# Altium PCB Tigershark 3D R2.3 - TR.PcbDoc (part 1 of 4)
Units mil, origin at the board's own origin, x right, y up, seen from the top; angles counter-clockwise.
Board outline 4100 x 4050 mil, 4 copper layers (Top Layer, Groun Plane, Power Plane, Bottom Layer), stack 61.73 mil thick; 367 components, 240 nets, 1160 pads, 805 vias.
Unrouted connection lines stored in the file: 6.
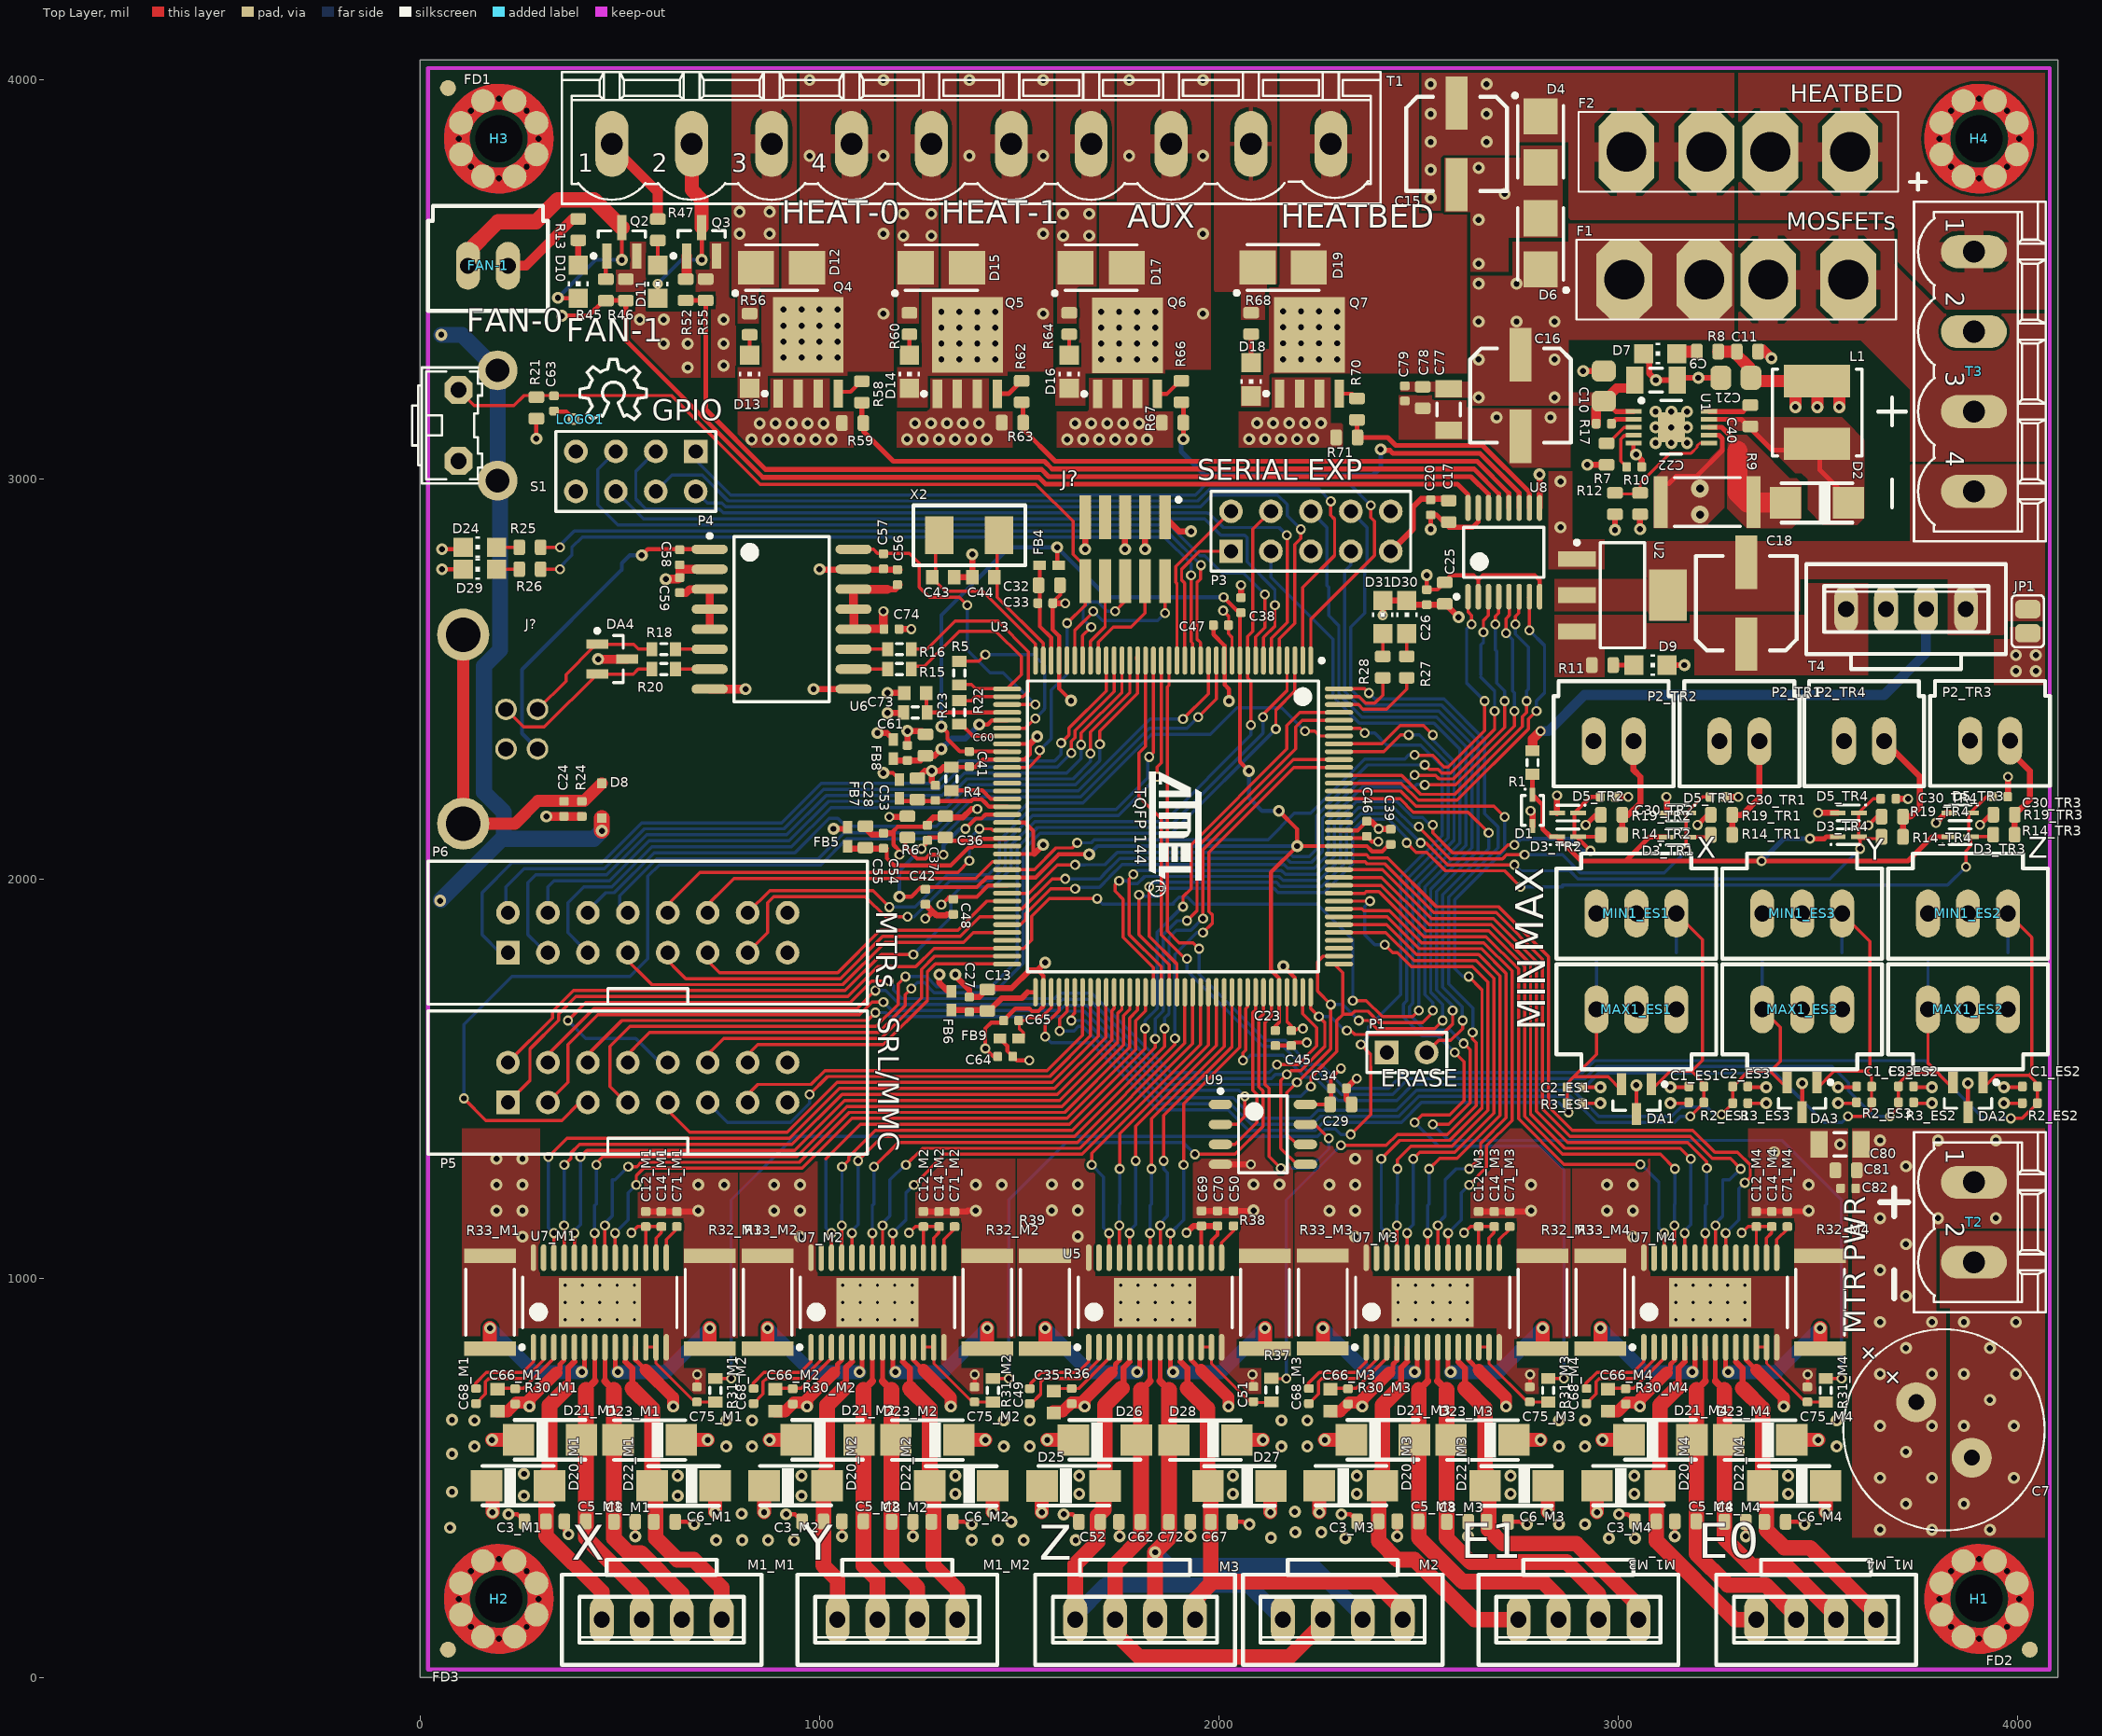
[diagram p0: Top Layer view]
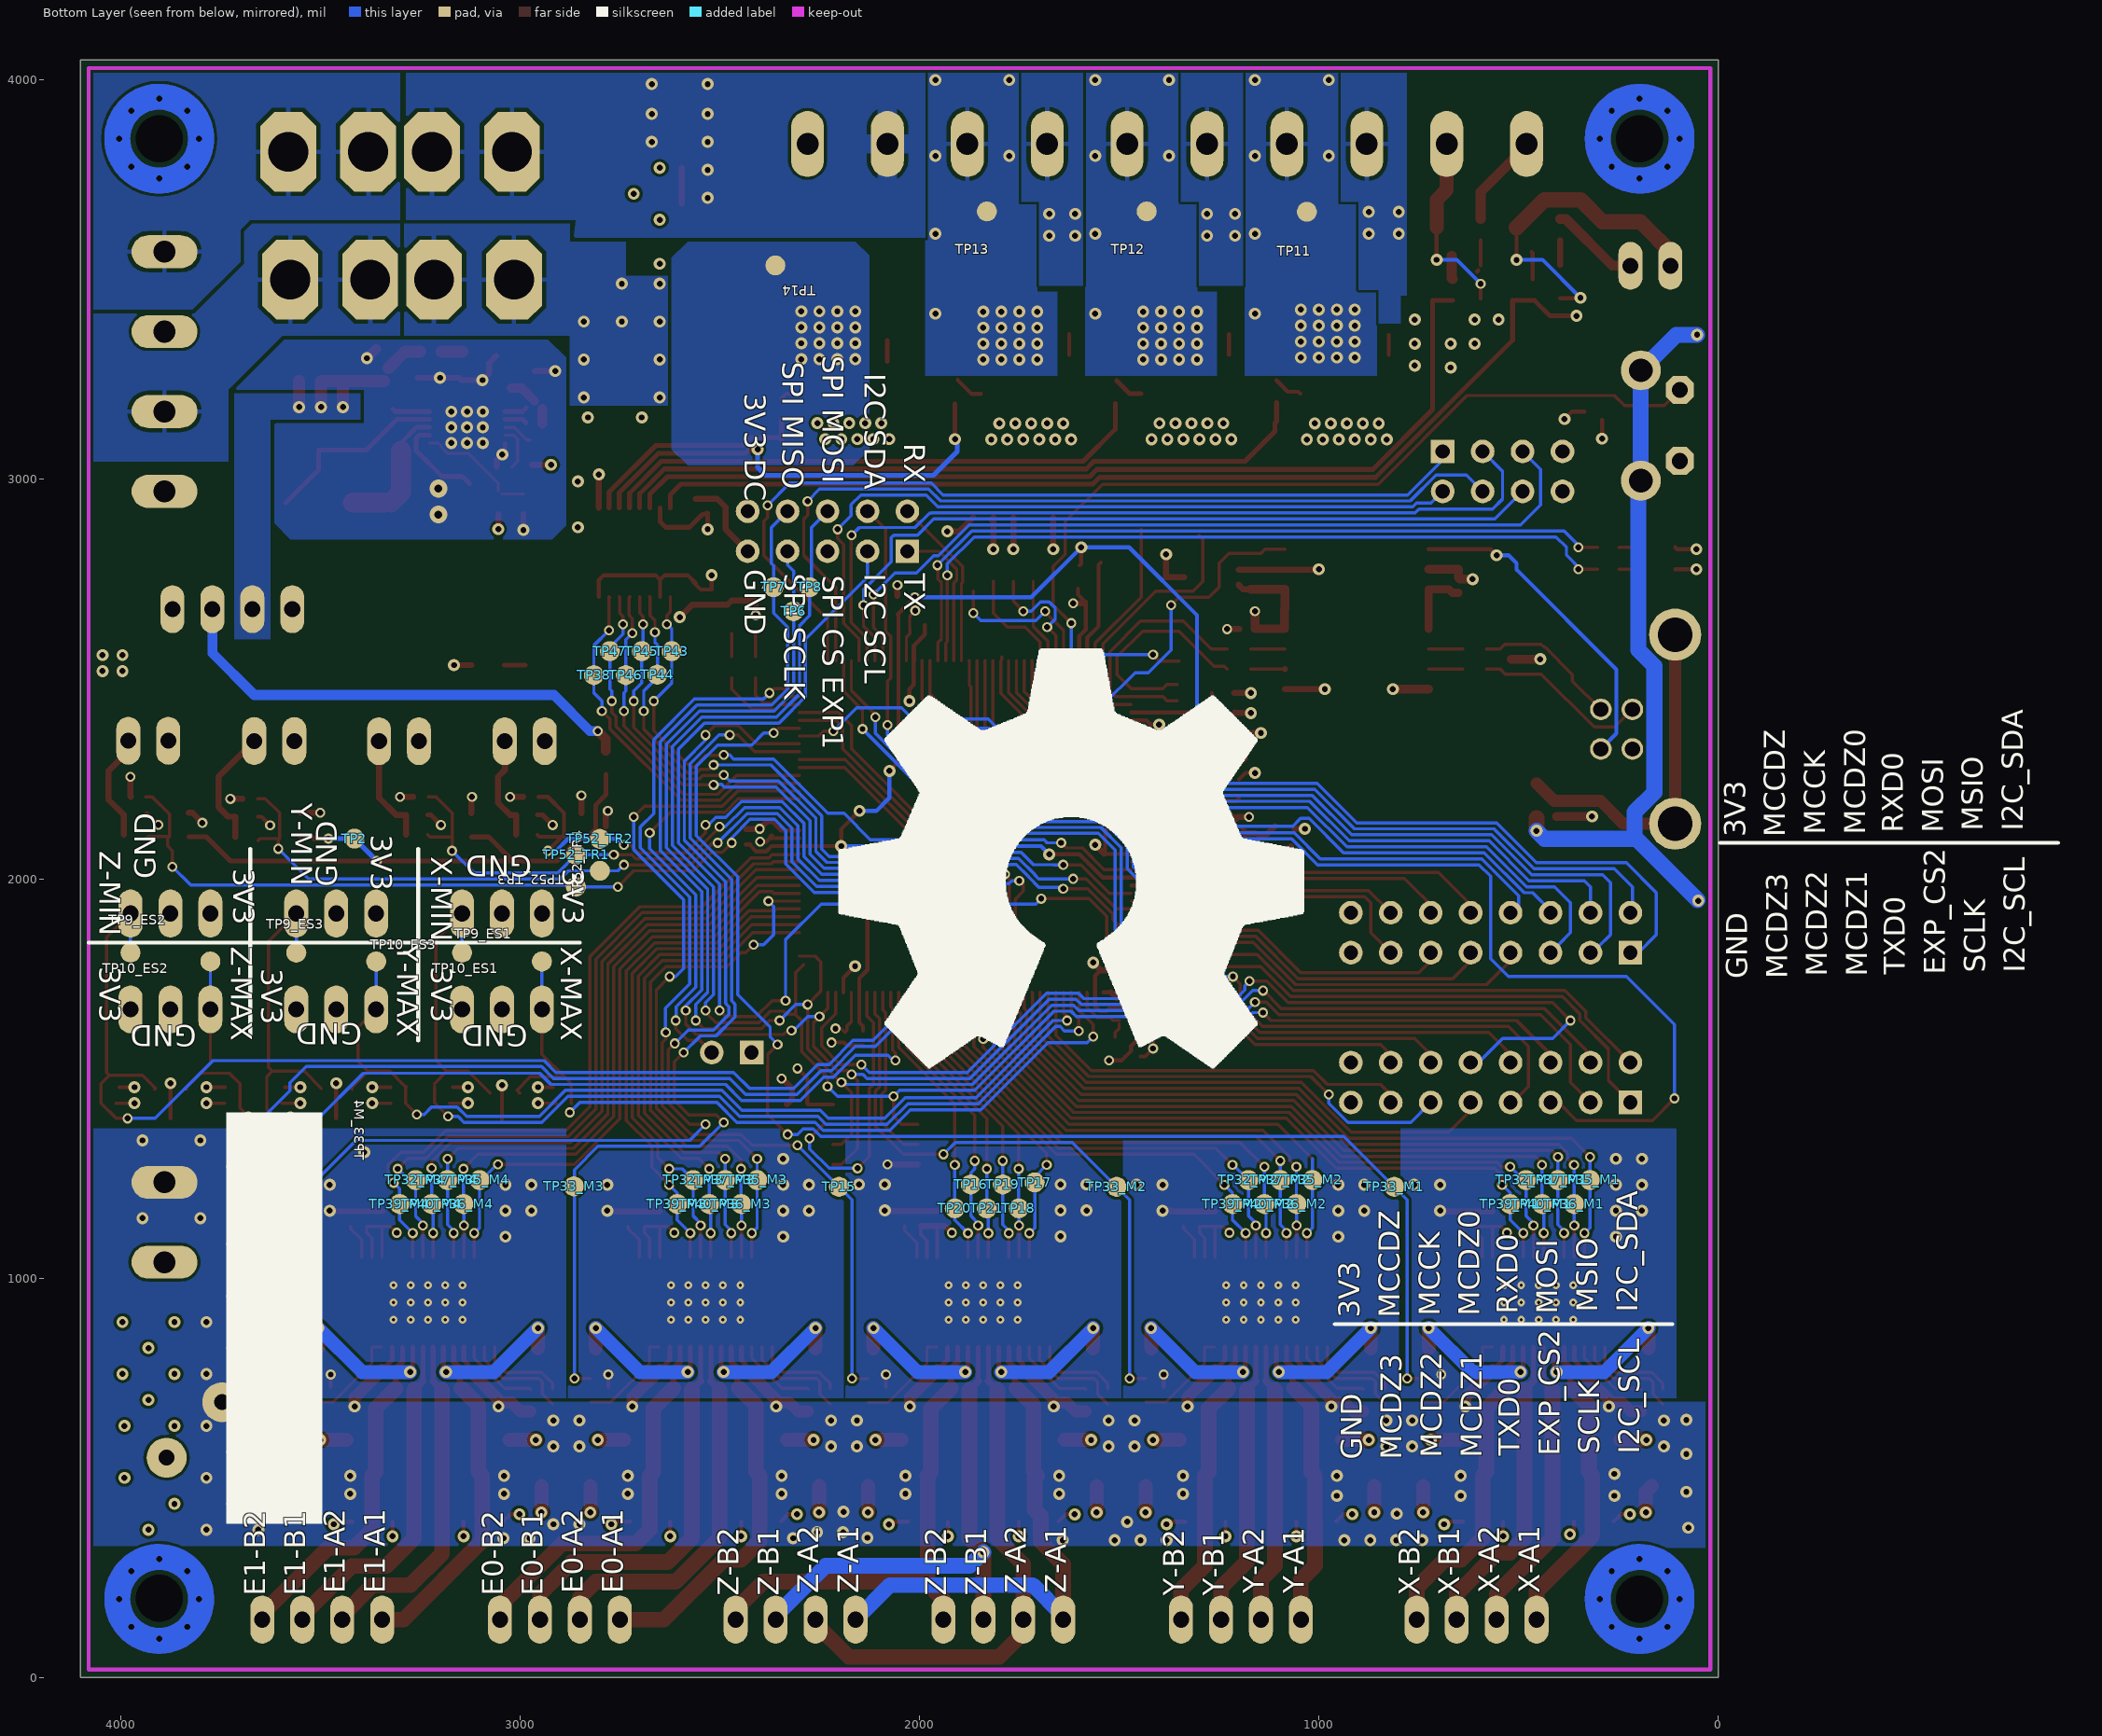
[diagram p1: Bottom Layer view, seen from below]
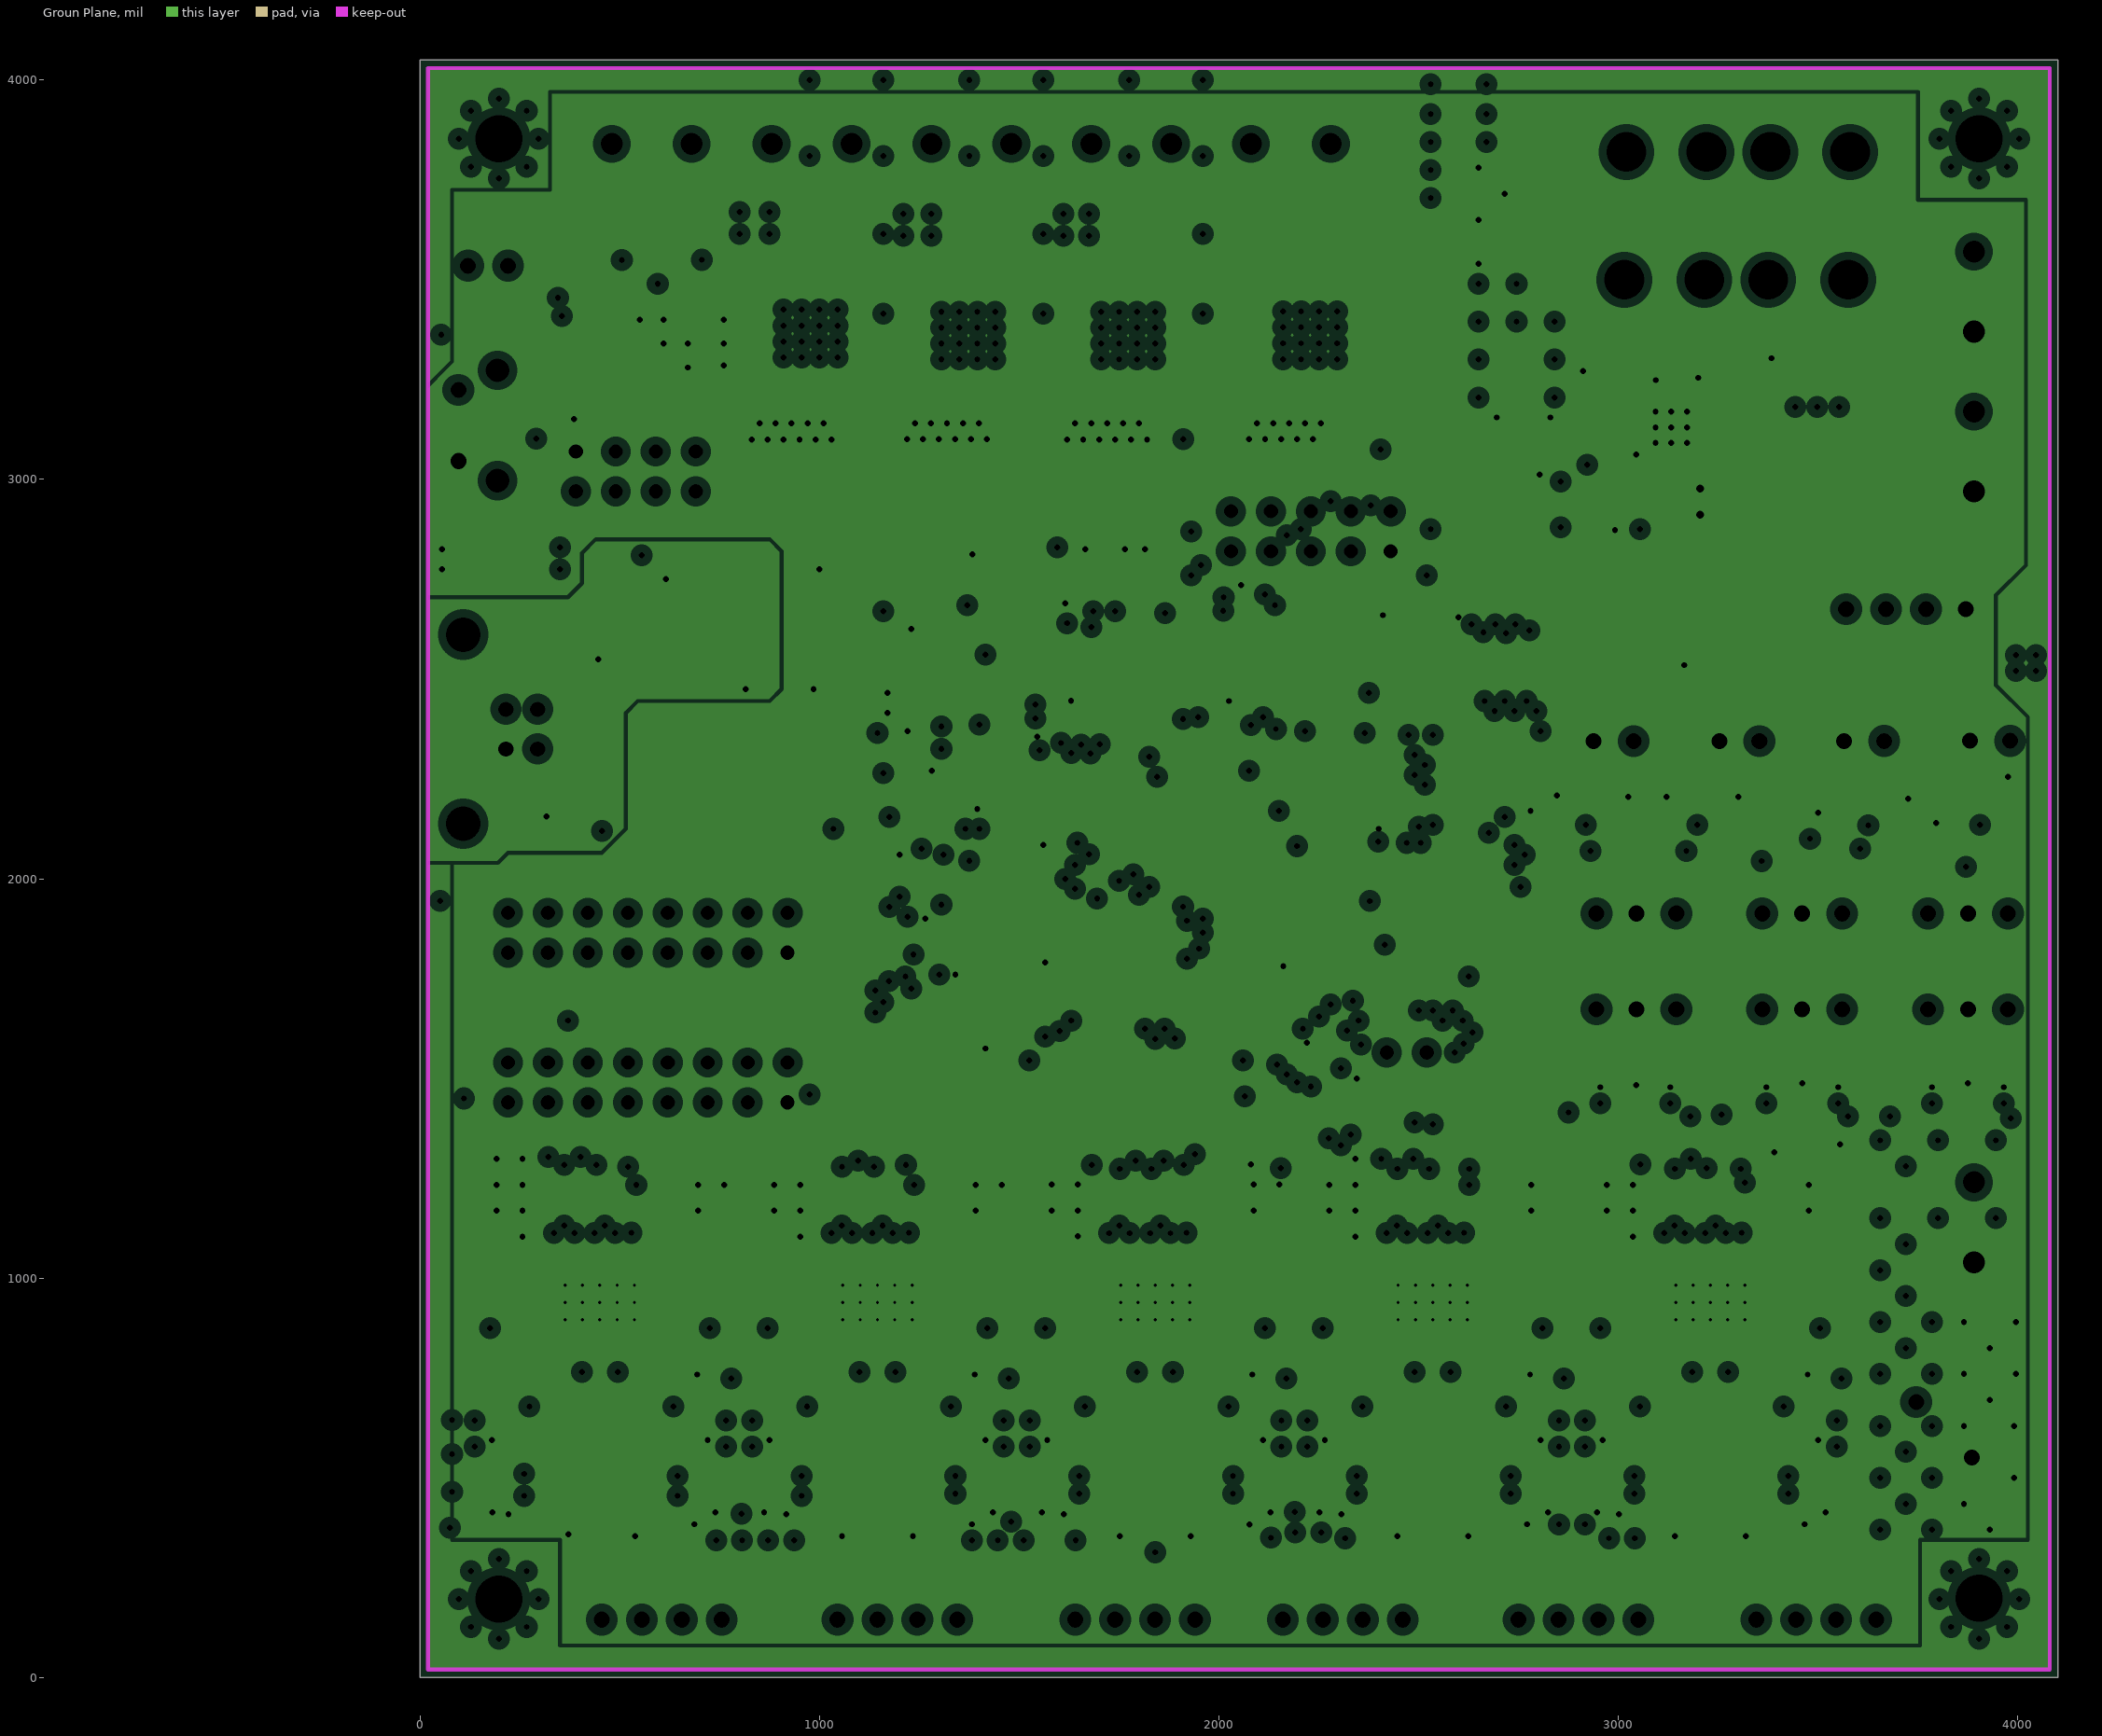
[diagram p2: Groun Plane, clearances drawn from the general rule]
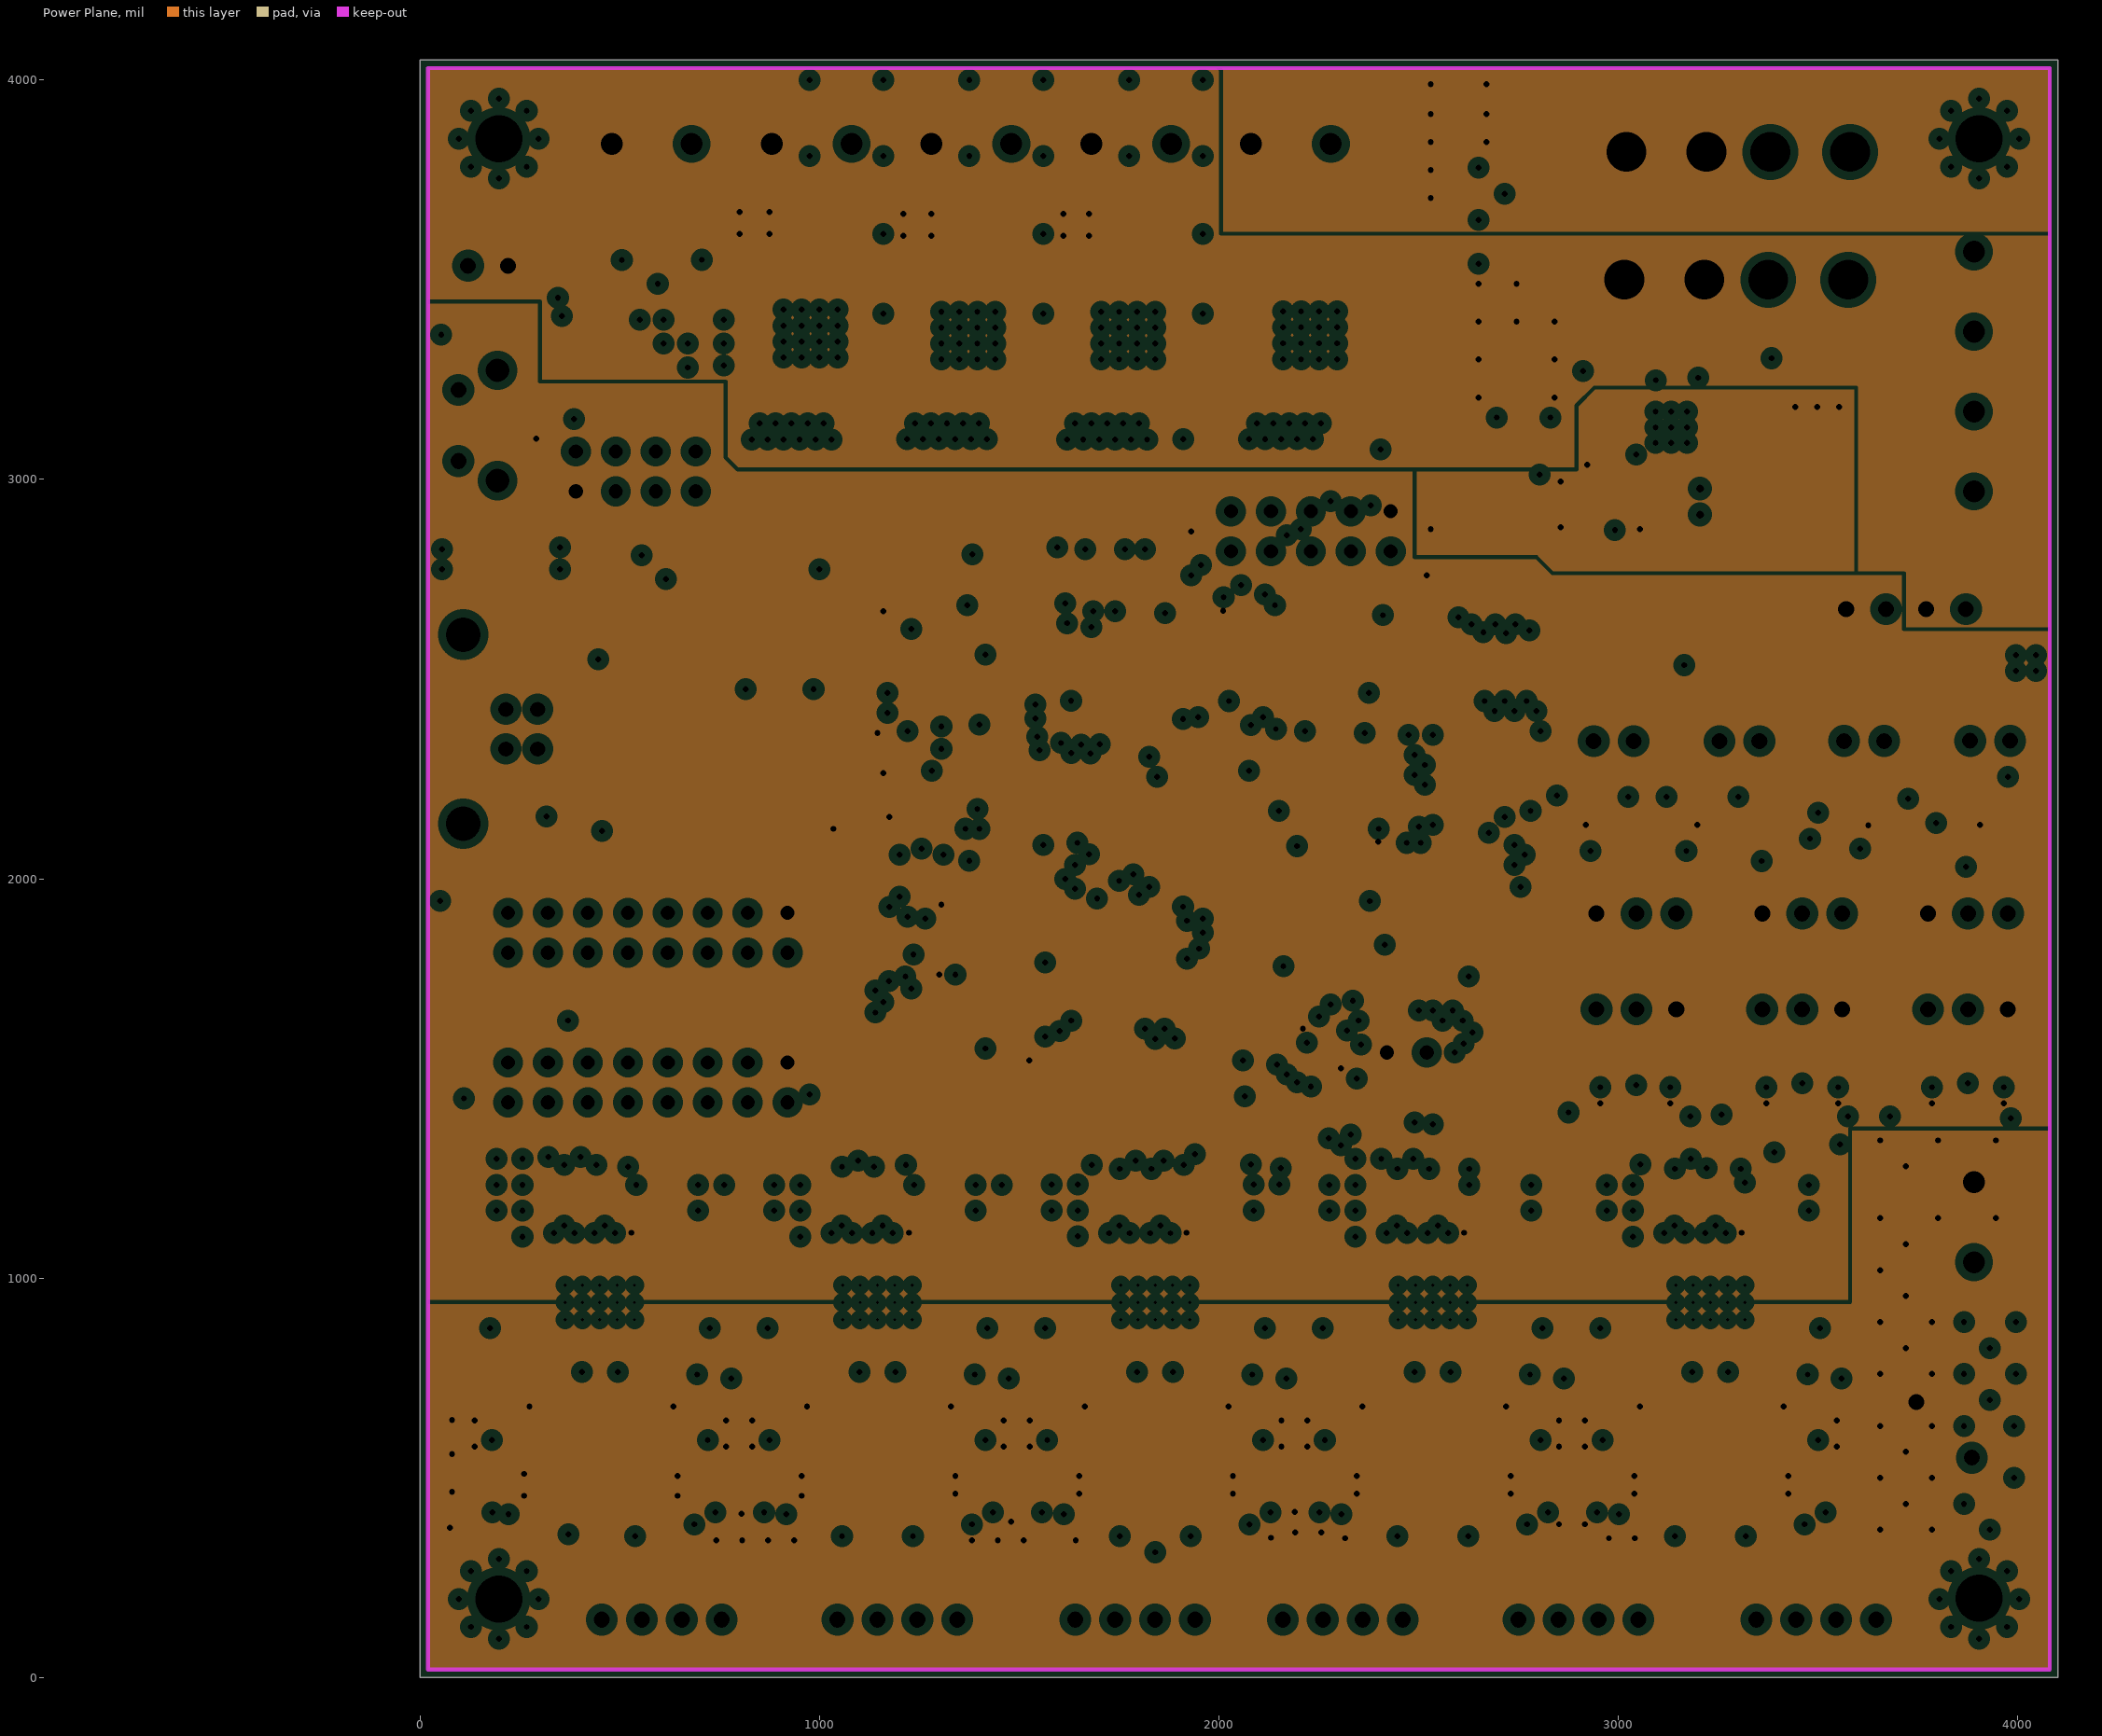
[diagram p3: Power Plane, clearances drawn from the general rule]

## Layer stack, top to bottom
Top Solder: solder mask 0.4, Solder Resist, Dk 3.5
Top Layer: signal copper 2.75
Dielectric1: prepreg 21.654, FR-4, Dk 4.2
Groun Plane: plane copper 1.4, net (Multiple Nets)
Dielectric2: core 10.236, FR-4, Dk 4.2
Power Plane: plane copper 1.4, net (Multiple Nets)
Dielectric3: prepreg 21.54, FR-4, Dk 4.2
Bottom Layer: signal copper 2.75
Bottom Solder: solder mask 0.4, Solder Resist, Dk 3.5

## Board outline
0,0 4100,0 4100,4050 0,4050

## Design rules (kind name [scope] priority, off if disabled: settings)
Clearance [All] p1: gap=7
ComponentClearance [All] p1: gap=0 collisioncheckmode=3 verticalgap=10 showdistances=FALSE
DiffPairsRouting [All] p1: maxlimit=10 minlimit=10 mostfreqgap=10 toplayer_minwidth=15 toplayer_maxwidth=15 toplayer_prefwidth=15 bottomlayer_minwidth=15 bottomlayer_maxwidth=15 bottomlayer_prefwidth=15 maxuncoupledlength=500
FanoutControl Fanout_SOIC [(InComponent('U8') AND InComponent('U7'))] p3: bgadir=Out bgaviamode=Centered fanoutstyle=Staggered fanoutdirection=Alternating viagrid=1 // Fanout_SOIC (Default Rule)
FanoutControl Fanout_Small [All] p4: bgadir=Out bgaviamode=Centered fanoutstyle=Auto fanoutdirection=Alternating viagrid=1 // Fanout_Small (Default Rule)
HoleSize [All] p1: absolutevalues=TRUE maxlimit=200 minlimit=15 maxpercent=80.000 minpercent=20.000
MinimumSolderMaskSliver [All] p1 off: minsoldermaskwidth=10
PlaneClearance [All] p1: clearance=20
PlaneConnect "Thermal Relief 50mil" [(InComponent('F1') or InComponent('F2') or InComponent('T1') or InComponent('T2') or InComponent('T3') or InComponent('C7'))] p1: planeconnectstyle=Relief reliefexpansion=20 reliefentries=4 reliefconductorwidth=10 reliefairgap=10
PlaneConnect "Thermal Relief 24mil" [(InComponent('P2_TR1') OR InComponent('P2_TR2') OR InComponent('MIN1_ES1') OR InNet('MAX_ES1') OR InComponent('MAX1_ES2') OR InComponent('MIN1_ES2') OR InComponent('MIN1_ES3') OR InComponent('MAX1_ES3') OR InComponent('S1') OR InComponent('USB') OR InComponent('P3') OR InComponent('P4') OR InComponent('P5') OR InComponent('P6')  OR InComponent('FAN-1'))] p2: planeconnectstyle=Relief reliefexpansion=20 reliefentries=4 reliefconductorwidth=10 reliefairgap=10
PlaneConnect [All] p3: planeconnectstyle=Direct reliefexpansion=35 reliefentries=4 reliefconductorwidth=50 reliefairgap=10
PolygonConnect "50mil Thermal Relief Top Layer Rule" [InComponent('T1') vs ((InNet('+12VCC2') And OnLayer('Top Layer')) or (InNet('HTRA') And OnLayer('Top Layer')) or (InNet('HTR0') And OnLayer('Top Layer')) or (InNet('HTR1') And OnLayer('Top Layer'))  or (InNet('HTBD') And OnLayer('Top Layer'))or (InNet('NetF2_1') And OnLayer('Top Layer'))or (InNet('NetF1_1') And OnLayer('Top Layer'))or (InNet('GND') And OnLayer('Top Layer')))] p1: connectstyle=Relief reliefconductorwidth=50 reliefentries=4 polygonreliefangle="90 Angle" airgapwidth=10
PolygonConnect "50mil Thermal Relief Top Layer Rule 2" [InComponent('F2')   or InComponent('F1') or InComponent('T3') vs ((InNet('+12VCC3') And OnLayer('Top Layer')) or (InNet('NetF2_1') And OnLayer('Top Layer')) or (InNet('NetF1_1' And OnLayer('Top Layer'))))] p2: connectstyle=Relief reliefconductorwidth=50 reliefentries=4 polygonreliefangle="90 Angle" airgapwidth=10
PolygonConnect "50mil Thermal Relief Top Layer Rule 3" [InComponent('F1') or InComponent('T1') vs ((InNet('NetF1_1') And OnLayer('Top Layer')) or (InNet('+12VCC3') And OnLayer('Bottom Layer')))] p3: connectstyle=Relief reliefconductorwidth=50 reliefentries=4 polygonreliefangle="90 Angle" airgapwidth=10
PolygonConnect "12mil Thermal Relief Top Layer Rule_1" [InComponent('T1') vs InNet('+12VCC3') And OnLayer('Top Layer')] p4: connectstyle=Relief reliefconductorwidth=12 reliefentries=4 polygonreliefangle="90 Angle" airgapwidth=10
PolygonConnect "12mil Thermal Relief Bottom Layer Rule" [InComponent('T1') or InComponent('F1') or InComponent('F2') or InComponent('T3') vs ((InNet('+12VCC2') And OnLayer('Bottom Layer')) or (InNet('+12VCC3') And OnLayer('Bottom Layer')) or (InNet('NetF1_1') And OnLayer('Bottom Layer')) or (InNet('NetF2_1') And OnLayer('Bottom Layer')))] p5: connectstyle=Relief reliefconductorwidth=12 reliefentries=4 polygonreliefangle="90 Angle" airgapwidth=10
PolygonConnect "T3 12mil Thermal Relief Bottom Layer Rule_1" [InComponent('T3') vs ((InNet('GND') And OnLayer('Bottom Layer')) or (InNet('NetF2_1') And OnLayer('Bottom Layer')) or (InNet('NetF1_1') And OnLayer('Bottom Layer')))] p6: connectstyle=Relief reliefconductorwidth=12 reliefentries=4 polygonreliefangle="90 Angle" airgapwidth=10
PolygonConnect "T3 12mil Thermal Relief Bottom Layer Rule" [InComponent('T1') vs ((InNet('GND') And OnLayer('Bottom Layer'))  or (InNet('HTRA') And OnLayer('Bottom Layer')) or (InNet('HTR0') And OnLayer('Bottom Layer')) or (InNet('HTR1') And OnLayer('Bottom Layer'))  or (InNet('HTBD') And OnLayer('Bottom Layer')))] p7: connectstyle=Relief reliefconductorwidth=12 reliefentries=4 polygonreliefangle="90 Angle" airgapwidth=10
PolygonConnect "24mil Thermal Relief" [(InComponent('P2_TR1') OR InComponent('P2_TR2') OR InComponent('MIN1_ES1') OR InNet('MAX_ES1') OR InComponent('MAX1_ES2') OR InComponent('MIN1_ES2') OR InComponent('MIN1_ES3') OR InComponent('MAX1_ES3') OR InComponent('S1') OR InComponent('USB') OR InComponent('P3') OR InComponent('P4') OR InComponent('P5') OR InComponent('P6')OR InComponent('FAN-1'))] p8: connectstyle=Relief reliefconductorwidth=24 reliefentries=4 polygonreliefangle="90 Angle" airgapwidth=10
PolygonConnect [All] p9: connectstyle=Direct reliefconductorwidth=45 reliefentries=4 polygonreliefangle="90 Angle" airgapwidth=10
RoutingVias [All] p1: holewidth=15 width=25 viastyle="Through Hole" minholewidth=15 minwidth=25 maxholewidth=28 maxwidth=50
SilkToSilkClearance [All] p1 off: silktosilkclearance=10
SilkToSolderMaskClearance SilkscreenOverComponentPads [IsPad] p1 off: minsilkscreentomaskgap=10 clearancetoexposedcopper=TRUE
SolderMaskExpansion [All] p1: expansion=4
UnpouredPolygon [All] p1: allowunpoured=FALSE
Width [All] p1: maxlimit=200 minlimit=7 preferedwidth=8 minimp=50.000000 maximp=50.000000 favimp=50.000000
19 further rules are at their usual default settings.

## Classes and differential pairs
net class THERM_AN_BUS[1..4]: THERM_AN_BUS1 THERM_AN_BUS2 THERM_AN_BUS3 THERM_AN_BUS4
component class TR4: C30_TR4 D3_TR4 D5_TR4 P2_TR4 R14_TR4 R19_TR4 TP52_TR4
component class TR3: C30_TR3 D3_TR3 D5_TR3 P2_TR3 R14_TR3 R19_TR3 TP52_TR3
component class "U_MOSFETs and Driver": C17 C20 C25 C26 D10 D11 D12 D13 D14 D15 D16 D17 D18 D19 FAN-1 Q2 Q3 Q4 Q5 Q6 Q7 R13 R45 R46 R47 R52 R55 R56 R58 R59 R60 R62 R63 R64 R66 R67 R68 R70 R71 T1 TP11 TP12 TP13 TP14 TP38 TP43 TP44 TP45 TP46 TP47 U8
component class ES3: C1_ES3 C2_ES3 MAX1_ES3 MIN1_ES3 R2_ES3 R3_ES3 TP9_ES3 TP10_ES3
component class ES2: C1_ES2 C2_ES2 MAX1_ES2 MIN1_ES2 R2_ES2 R3_ES2 TP9_ES2 TP10_ES2
component class ES1: C1_ES1 C2_ES1 MAX1_ES1 MIN1_ES1 R2_ES1 R3_ES1 TP9_ES1 TP10_ES1
component class U_MZ: C35 C49 C50 C51 C52 C62 C67 C69 C70 C72 D25 D26 D27 D28 M2 M3 R32_DriverChannelDRV88255 R33_DriverChannelDRV88255 R36 R37 R38 R39 TP15 TP16 TP17 TP18 TP19 TP20 TP21 U5
component class M4: C3_M4 C5_M4 C6_M4 C8_M4 C12_M4 C14_M4 C66_M4 C68_M4 C71_M4 C75_M4 D20_M4 D21_M4 D22_M4 D23_M4 M1_M4 R30_M4 R31_M4 R32_DriverChannelDRV88254 R32_M4 R33_DriverChannelDRV88254 R33_M4 TP32_M4 TP33_M4 TP35_M4 TP36_M4 TP37_M4 TP39_M4 TP40_M4 U7_M4
component class M3: C3_M3 C5_M3 C6_M3 C8_M3 C12_M3 C14_M3 C66_M3 C68_M3 C71_M3 C75_M3 D20_M3 D21_M3 D22_M3 D23_M3 M1_M3 R30_M3 R31_M3 R32_DriverChannelDRV88253 R32_M3 R33_DriverChannelDRV88253 R33_M3 TP32_M3 TP33_M3 TP35_M3 TP36_M3 TP37_M3 TP39_M3 TP40_M3 U7_M3
component class M2: C3_M2 C5_M2 C6_M2 C8_M2 C12_M2 C14_M2 C66_M2 C68_M2 C71_M2 C75_M2 D20_M2 D21_M2 D22_M2 D23_M2 M1_M2 R30_M2 R31_M2 R32_DriverChannelDRV88252 R32_M2 R33_DriverChannelDRV88252 R33_M2 TP32_M2 TP33_M2 TP35_M2 TP36_M2 TP37_M2 TP39_M2 TP40_M2 U7_M2
component class M1: C3_M1 C5_M1 C6_M1 C8_M1 C12_M1 C14_M1 C66_M1 C68_M1 C71_M1 C75_M1 D20_M1 D21_M1 D22_M1 D23_M1 M1_M1 R30_M1 R31_M1 R32_DriverChannelDRV88251 R32_M1 R33_DriverChannelDRV88251 R33_M1 TP32_M1 TP33_M1 TP35_M1 TP36_M1 TP37_M1 TP39_M1 TP40_M1 U7_M1
component class "ATSAM3X8E Main Controller - TR R1.1": C13 C23 C24 C27 C28 C29 C32 C33 C34 C36 C37 C38 C39 C41 C42 C43 C44 C45 C46 C47 C48 C53 C54 C55 C56 C57 C58 C59 C60 C61 C63 C64 C65 C73 C74 D8 D24 D29 D30 D31 DA1 DA2 DA3 DA4 FB4 FB5 FB6 FB7 FB8 FB9 FD1 FD2 FD3 J? LOGO1 microSD P1 P3 P4 P5 P6 R4 R5 R6 R15 R16 R18 R20 R21 R22 R23 R24 R25 R26 R27 R28 S1 TP6 TP7 TP8 U3 U6 U9 X2
component class Designator: C7 C9 C10 C11 C15 C16 C18 C21 C22 C40 C77 C78 C79 C80 C81 C82 D1 D2 D4 D6 D7 D9 F1 F2 H1 H2 H3 H4 JP1 L1 R1 R7 R8 R9 R10 R11 R12 R17 T2 T3 T4 TP2 U1 U2
net class MAX_ES_BUS[1..3]: MAX_ES0
net class MIN_ES_BUS[1..3]: MIN_ES0
component class TR1: C30_ThermistorChannel1 C30_TR1 D3_ThermistorChannel1 D3_TR1 D5_ThermistorChannel1 D5_TR1 P2_TR1 R14_TR1 R19_ThermistorChannel1 R19_TR1 TP52_TR1
component class TR2: C30_TR2 D3_ThermistorChannel2 D3_TR2 D5_ThermistorChannel2 D5_TR2 P2_TR2 R14_TR2 R19_ThermistorChannel2 R19_TR2 TP52_TR2
channel class ES: ES1 ES2 ES3
channel class M: M1 M2 M3 M4 M5
channel class TR: TR1 TR2
net class DIR_BUS[1..4]: DIR_BUS1 DIR_BUS2 DIR_BUS3 DIR_BUS4
net class EN_BUS[1..4]: EN_BUS1 EN_BUS2 EN_BUS3 EN_BUS4
net class MOD0E_BUS[1..4]: MOD0E_BUS1 MOD0E_BUS2 MOD0E_BUS3 MOD0E_BUS4
net class MOD1E_BUS[1..4]: MOD1E_BUS1 MOD1E_BUS2 MOD1E_BUS3 MOD1E_BUS4
net class MOD2E_BUS[1..4]: MOD2E_BUS1 MOD2E_BUS2 MOD2E_BUS3 MOD2E_BUS4
net class REF_BUS[1..4]: REF_BUS1 REF_BUS2 REF_BUS3 REF_BUS4
net class STEP_BUS[1..4]: STEP_BUS1 STEP_BUS2 STEP_BUS3 STEP_BUS4
differential pair UMCU: +UMCU_P -UMCU_N
differential pair UI: +UI_P -UI_N
differential pair UD: +UD_P -UD_N
differential pair R: +R_P -R_N

## Components (designator, comment, footprint, x,y, rotation, side; value= is the part's Value field where it differs from the comment)
C1_ES1 "4.7nF" C0402 3195,1480 r0 top (schematic designator C1)
C1_ES2 "4.7nF" C0402 4030,1480 r0 top (schematic designator C1)
C1_ES3 "4.7nF" C0402 3615,1480 r0 top (schematic designator C1)
C2_ES1 "4.7nF" C0402 2890,1478.03 r180 top (schematic designator C2)
C2_ES2 "4.7nF" C0402 3720,1480 r180 top (schematic designator C2)
C2_ES3 "4.7nF" C0402 3305,1480 r180 top (schematic designator C2)
C3_M1 "10uF" C0603 288,391 r180 top (schematic designator C3)
C3_M2 "10uF" C0603 983,391 r180 top (schematic designator C3)
C3_M3 "10uF" C0603 2373,391 r180 top (schematic designator C3)
C3_M4 "10uF" C0603 3068,391 r180 top (schematic designator C3)
C5_M1 "10uF" C0603 388,391 r180 top (schematic designator C5)
C5_M2 "10uF" C0603 1083,391 r180 top (schematic designator C5)
C5_M3 "10uF" C0603 2473,391 r180 top (schematic designator C5)
C5_M4 "10uF" C0603 3168,391 r180 top (schematic designator C5)
C6_M1 "10uF" C0603 612,390 r0 top (schematic designator C6)
C6_M2 "10uF" C0603 1307,390 r0 top (schematic designator C6)
C6_M3 "10uF" C0603 2697,390 r0 top (schematic designator C6)
C6_M4 "10uF" C0603 3392,390 r0 top (schematic designator C6)
C7 "470uF" C12,5-5 3815,620 r315 top
C8_M1 "10uF" C0603 512,390 r0 top (schematic designator C8)
C8_M2 "10uF" C0603 1207,390 r0 top (schematic designator C8)
C8_M3 "10uF" C0603 2597,390 r0 top (schematic designator C8)
C8_M4 "10uF" C0603 3292,390 r0 top (schematic designator C8)
C9 "4.7uF" C1206#1 3094.31,3248.43 r0 top
C10 "1uF" C0805 2963.31,3233.43 r90 top
C11 "100nF" C0603 3323,3320 r0 top
C12_M1 "0402" C0402 565,1148 r270 top (schematic designator C12)
C12_M2 "0402" C0402 1260,1148 r270 top (schematic designator C12)
C12_M3 "0402" C0402 2650,1148 r270 top (schematic designator C12)
C12_M4 "0402" C0402 3345,1148 r270 top (schematic designator C12)
C13 "0603" C0603 1420,1696.1 r270 top
C14_M1 "0402" C0402 604,1148 r270 top (schematic designator C14)
C14_M2 "0402" C0402 1299,1148 r270 top (schematic designator C14)
C14_M3 "0402" C0402 2689,1148 r270 top (schematic designator C14)
C14_M4 "0402" C0402 3384,1148 r270 top (schematic designator C14)
C15 "EEE-1VA101XP" EEE-1VA101XP 2595,3840 r90 top
C16 "EEE-1VA101XP" EEE-1VA101XP 2755,3210 r90 top
C17 "0603" C0603 2575,2920 r270 top
C18 "EEE-1VA101XP" EEE-1VA101XP 3320,2690 r270 top
C20 "0402" C0402 2530,2930 r270 top
C21 "10uF" C0805 3294.31,3254.43 r180 top
C22 "1uF" C0402 3039.31,3031.43 r0 top
C23 "100nF" C0402 2141.1,1601.1 r270 top
C24 "0402" C0402 360,2175 r90 top
C25 "0603" C0603 2565,2715 r90 top
C26 "0402" C0402 2520,2705 r90 top
C27 "100nF" C0402 1375,1685 r90 top
C28 "0603" C0603 1245,2225 r270 top
C29 "0603" C0603 2305,1435 r180 top
C30_TR1 "100nF" C0402 3247.95,2205 r0 top (schematic designator C30)
C30_TR2 "100nF" C0402 2972.95,2205 r0 top (schematic designator C30)
C30_TR3 "100nF" C0402 3955.47,2205.47 r0 top (schematic designator C30)
C30_TR4 "100nF" C0402 3675.47,2200.47 r0 top (schematic designator C30)
C32 "0603" C0603 1575,2735 r180 top
C33 "100nF" C0402 1565,2690 r0 top
C34 "100nF" C0402 2300,1475 r0 top
C35 "0603" 1608[0603] 1586.26,689.74 r90 top
C36 "0603" C0603 1315,2130 r270 top
C37 "100nF" C0402 1270,2115 r90 top
C38 "100nF" C0402 2055,2685 r90 top
C39 "100nF" C0402 2430,2105 r90 top
C40 "100nF" C0603 3330.31,3159.43 r270 top
C41 "100nF" C0402 1375,2300 r270 top
C42 "100nF" C0402 1265,1955 r270 top
C43 "0603" 1608[0603] 1310,2755 r180 top
C44 "0603" 1608[0603] 1410,2755 r0 top
C45 "100nF" C0402 2181.1,1601.1 r270 top
C46 "100nF" C0402 2370,2125 r90 top
C47 "100nF" C0402 2005,2635 r180 top
C48 "100nF" C0402 1335,1930 r270 top
C49 "0402" C0402 1526.26,704.74 r270 top
C50 "0402" C0402 2036.26,1149.74 r270 top
C51 "0402" C0402 2086.26,709.74 r270 top
C52 "10uF" C0603 1676.26,389.74 r180 top
C53 "100nF" C0402 1290,2215 r90 top
C54 "100nF" C0402 1160,2095 r90 top
C55 "0603" C0603 1115,2105 r270 top
C56 "100nF" C0402 1195,2755 r90 top
C57 "100nF" C0402 1160,2795 r270 top
C58 "100nF" C0402 650,2805 r270 top
C59 "100nF" C0402 650,2735 r90 top
C60 "0603" C0603 1265,2335 r270 top
C61 "100nF" C0402 1220,2315 r90 top
C62 "10uF" C0603 1776.26,389.74 r180 top
C63 "0402" C0402 335,3190 r90 top
C64 "100nF" C0402 1465,1555 r180 top
C65 "100nF" C0402 1480,1645 r180 top
C66_M1 "0603" 1608[0603] 194,694 r90 top (schematic designator C66)
C66_M2 "0603" 1608[0603] 889,694 r90 top (schematic designator C66)
C66_M3 "0603" 1608[0603] 2279,694 r90 top (schematic designator C66)
C66_M4 "0603" 1608[0603] 2974,694 r90 top (schematic designator C66)
C67 "10uF" C0603 2006.26,389.74 r0 top
C68_M1 "0402" C0402 140,705 r270 top (schematic designator C68)
C68_M2 "0402" C0402 835,705 r270 top (schematic designator C68)
C68_M3 "0402" C0402 2225,705 r270 top (schematic designator C68)
C68_M4 "0402" C0402 2920,705 r270 top (schematic designator C68)
C69 "0402" C0402 1956.26,1149.74 r270 top
C70 "0402" C0402 1996.26,1149.74 r270 top
C71_M1 "0402" C0402 643,1148 r270 top (schematic designator C71)
C71_M2 "0402" C0402 1338,1148 r270 top (schematic designator C71)
C71_M3 "0402" C0402 2728,1148 r270 top (schematic designator C71)
C71_M4 "0402" C0402 3423,1148 r270 top (schematic designator C71)
C72 "10uF" C0603 1901.26,389.74 r0 top
C73 "0603" 1608[0603] 1240,2465 r0 top
C74 "100nF" C0402 1180,2625 r0 top
C75_M1 "0402" C0402 693,709 r270 top (schematic designator C75)
C75_M2 "0402" C0402 1388,709 r270 top (schematic designator C75)
C75_M3 "0402" C0402 2778,709 r270 top (schematic designator C75)
C75_M4 "0402" C0402 3473,709 r270 top (schematic designator C75)
C77 "10uF 50V" C1206#2 2575,3175 r270 top
C78 "0.1uF 50V" C0603 2510,3205 r270 top
C79 "0402" C0402 2465,3215 r90 top
C80 "10uF 50V" C1206#2 3555,1335 r180 top
C81 "0.1uF 50V" C0603 3570,1270 r180 top
C82 "0402" C0402 3575,1224.71 r0 top
D1 "SZMM3Z4V7T1G" SZMM3Z4V7T1G 2785,2171.3 r90 top
D2 "SK310A-TP" SMA-SM 3497.31,2941.43 r180 top
D3_TR1 "Diode 1N4148" 1N4148WT 3147.95,2104.53 r180 top (schematic designator D3)
D3_TR2 "Diode 1N4148" 1N4148WT 2872.95,2105 r180 top (schematic designator D3)
D3_TR3 "Diode 1N4148" 1N4148WT 3855.47,2105.47 r180 top (schematic designator D3)
D3_TR4 "Diode 1N4148" 1N4148WT 3575.47,2105.47 r180 top (schematic designator D3)
D4 "SK310A-TP" SK310A-TP 2805,3845 r90 top
D5_TR1 "Diode 1N4148" 1N4148WT 3147.95,2164.53 r0 top (schematic designator D5)
D5_TR2 "Diode 1N4148" 1N4148WT 2872.95,2164.53 r0 top (schematic designator D5)
D5_TR3 "Diode 1N4148" 1N4148WT 3855.47,2165 r0 top (schematic designator D5)
D5_TR4 "Diode 1N4148" 1N4148WT 3575.47,2165 r0 top (schematic designator D5)
D6 "SK310A-TP" SK310A-TP 2805,3590 r270 top
D7 "5988110107F" LED2012120 3105,3315 r180 top
D8 "RSB39VTE-17" SOD323-R 455,2195 r90 top
D9 "5988110107F" LED2012120 3080,2535 r0 top
D10 "5988140107F" LED2012120 396,3495.57 r270 top
D11 "5988140107F" LED2012120 595,3495 r270 top
D12 "B240A-13-F" SK310A-TP 905,3530 r180 top
D13 "5988140107F" LED2012120 825,3270 r270 top
D14 "5988140107F" LED2012120 1225,3270 r270 top
D15 "B240A-13-F" SK310A-TP 1305,3530 r180 top
D16 "5988140107F" LED2012120 1625,3270 r270 top
D17 "B240A-13-F" SK310A-TP 1705,3530 r180 top
D18 "5988140107F" LED2012120 2080.5,3250.81 r270 top
D19 "B240A-13-F" SK310A-TP 2160.5,3530.81 r180 top
D20_M1 "SMAJ30A" SMA-SM 245,480 r0 top (schematic designator D20)
D20_M2 "SMAJ30A" SMA-SM 940,480 r0 top (schematic designator D20)
D20_M3 "SMAJ30A" SMA-SM 2330,480 r0 top (schematic designator D20)
D20_M4 "SMAJ30A" SMA-SM 3025,480 r0 top (schematic designator D20)
D21_M1 "SMAJ30A" SMA-SM 325,595 r0 top (schematic designator D21)
D21_M2 "SMAJ30A" SMA-SM 1020,595 r0 top (schematic designator D21)
D21_M3 "SMAJ30A" SMA-SM 2410,595 r0 top (schematic designator D21)
D21_M4 "SMAJ30A" SMA-SM 3105,595 r0 top (schematic designator D21)
D22_M1 "SMAJ30A" SMA-SM 660,480 r180 top (schematic designator D22)
D22_M2 "SMAJ30A" SMA-SM 1355,480 r180 top (schematic designator D22)
D22_M3 "SMAJ30A" SMA-SM 2745,480 r180 top (schematic designator D22)
D22_M4 "SMAJ30A" SMA-SM 3440,480 r180 top (schematic designator D22)
D23_M1 "SMAJ30A" SMA-SM 575,595 r180 top (schematic designator D23)
D23_M2 "SMAJ30A" SMA-SM 1270,595 r180 top (schematic designator D23)
D23_M3 "SMAJ30A" SMA-SM 2660,595 r180 top (schematic designator D23)
D23_M4 "SMAJ30A" SMA-SM 3355,595 r180 top (schematic designator D23)
D24 "5988140107F" LED2012120 150,2830 r180 top
D25 "SMAJ30A" SMA-SM 1636.26,479.74 r0 top
D26 "SMAJ30A" SMA-SM 1714.03,594.74 r0 top
D27 "SMAJ30A" SMA-SM 2051.26,479.74 r180 top
D28 "SMAJ30A" SMA-SM 1966.26,594.74 r180 top
D29 "5988140107F" LED2012120 150,2775 r180 top
D30 "5988140107F" LED2012120 2470,2655 r90 top
D31 "5988140107F" LED2012120 2410,2655 r90 top
DA1 "PESDxL2BT" SOT95P230X110-3N 3045,1448.03 r270 top
DA2 "PESDxL2BT" SOT95P230X110-3N 3875,1453.03 r270 top
DA3 "PESDxL2BT" SOT95P230X110-3N 3460,1453.03 r270 top
DA4 "PESDxL2BT" SOT95P230X110-3N 480.88,2550 r0 top
F1 "3522-2" "3522-2 - WAVE SOLDER" 3295,3500 r180 top
F2 "3522-2" "3522-2 - WAVE SOLDER" 3300,3820 r180 top
FAN-1 "Molex 70543-02" 70543-02 170,3535 r180 top
FB4 "BLM15HG601SN1D" BLM18PG121SN1D 1575,2785 r180 top
FB5 "BLM15HG601SN1D" BLM18PG121SN1D 1070,2105 r270 top
FB6 "BLM15HG601SN1D" BLM18PG121SN1D 1330,1695 r270 top
FB7 "BLM15HG601SN1D" BLM18PG121SN1D 1200,2225 r270 top
FB8 "BLM15HG601SN1D" BLM18PG121SN1D 1185,2325 r270 top
FB9 "BLM15HG601SN1D" BLM18PG121SN1D 1475,1600 r0 top
FD1 "FIDUCIAL" FIDUCIAL-1X2 70,3980 r90 top
FD2 "FIDUCIAL" FIDUCIAL-1X2 4030,70 r0 top
FD3 "FIDUCIAL" FIDUCIAL-1X2 70,70 r270 top
H1 "Hole" Wave_hole_3x7-singleSided#1 3903.15,196.85 r0 top locked
H2 "Hole" Wave_hole_3x7-singleSided#2 196.85,196.85 r0 top locked
H3 "Hole" Wave_hole_3x7-singleSided#2 196.85,3853.15 r0 top locked
H4 "Hole" Wave_hole_3x7-singleSided#2 3903.15,3853.15 r0 top locked
J? "FTSH-105-XX-X-DV" FTSH-105-XX-X-DV 1765,2825 r0 top
J? "USB-B" PN61729 108,2374.94 r270 top locked
JP1 "SJ" SJ 4025,2645 r90 top
L1 "XAL5050-153MEB" XAL50xx-153 3497.31,3167.43 r90 top
LOGO1 "OSHW_LOGO_8MILX0150-NT" OSHW_8X150_NOTEXT 400,3150 r0 top
M1_M1 "Molex 0705430003" 4POL254 605,145 r180 top (schematic designator M1)
M1_M2 "Molex 0705430003" 4POL254 1195,145 r180 top (schematic designator M1)
M1_M3 "Molex 0705430003" 4POL254 2900,145 r180 top (schematic designator M1)
M1_M4 "Molex 0705430003" 4POL254 3495,145 r180 top (schematic designator M1)
M2 "Molex 0705430003" 4POL254 2310,145 r180 top
M3 "Molex 0705430003" 4POL254 1790,145 r180 top
MAX1_ES1 "Molex 70543-03" 70543-03 3045,1673.03 r0 top (schematic designator MAX1)
MAX1_ES2 "Molex 70543-03" 70543-03 3875,1673.03 r0 top (schematic designator MAX1)
MAX1_ES3 "Molex 70543-03" 70543-03 3460,1673.03 r0 top (schematic designator MAX1)
MIN1_ES1 "Molex 70543-03" 70543-03 3045,1913.03 r180 top (schematic designator MIN1)
MIN1_ES2 "Molex 70543-03" 70543-03 3875,1913.03 r180 top (schematic designator MIN1)
MIN1_ES3 "Molex 70543-03" 70543-03 3460,1913.03 r180 top (schematic designator MIN1)
P1 "ERASE" HDR1X2 2420,1565 r0 top
P2_TR1 "Molex 70543-02" 70543-02 3302.95,2344.53 r180 top (schematic designator P2)
P2_TR2 "Molex 70543-02" 70543-02 2987.95,2344.53 r180 top (schematic designator P2)
P2_TR3 "Molex 70543-02" 70543-02 3930.47,2345.47 r180 top (schematic designator P2)
P2_TR4 "Molex 70543-02" 70543-02 3615,2345 r180 top (schematic designator P2)
P3 "Header 5X2" HDR2X5 2030,2820 r0 top
P4 "Header 4X2" HDR2X4 690,3070 r180 top
P5 "302-S161" 302-S161 220,1540 r0 top
P6 "302-S161" 302-S161 220,1915 r0 top
Q2 "IRML6346TRPBF" IRLML6346 505,3594.78 r90 top
Q3 "IRML6346TRPBF" IRLML6346 705,3595 r90 top
Q4 "PSMN7R0-60YS" PSMN7R0-60YS 971.5,3317.03 r90 top
Q5 "PSMN7R0-60YS" PSMN7R0-60YS 1370,3316.64 r90 top
Q6 "PSMN7R0-60YS" PSMN7R0-60YS 1771,3316.22 r90 top
Q7 "PSMN7R0-60YS" PSMN7R0-60YS 2226.5,3317.03 r90 top
R1 "Res3" J1-0603 2785,2291.3 r90 top
R2_ES1 "2.7K" R0402 3195,1440 r180 top (schematic designator R2)
R2_ES2 "2.7K" R0402 4030,1438.03 r180 top (schematic designator R2)
R2_ES3 "2.7K" R0402 3615,1440 r180 top (schematic designator R2)
R3_ES1 "2.7K" R0402 2890,1438.03 r0 top (schematic designator R3)
R3_ES2 "2.7K" R0402 3720,1440 r0 top (schematic designator R3)
R3_ES3 "2.7K" R0402 3305,1438.03 r0 top (schematic designator R3)
R4 "0603" J1-0603 1330,2250 r90 top
R5 "0603" J1-0603 1350,2515 r90 top
R6 "100K" R0603 1220,2130 r90 top
R7 "10K" R0603 2970.31,3063.43 r270 top
R8 "1K" R0603 3223,3320 r0 top
R9 "0.6r" 2512R-0.55 3222.31,2943.43 r0 top
R10 "10K" R0603 3054.31,2939.43 r90 top
R11 "1K" R0603 2960,2535 r180 top
R12 "10K" R0603 2991.31,2939.43 r270 top
R13 "1.8K" R0603 396,3625.57 r90 top
R14_TR1 "4.7K" R0603 3257.95,2110 r180 top (schematic designator R14)
R14_TR2 "4.7K" R0603 2982.95,2110 r180 top (schematic designator R14)
R14_TR3 "4.7K" R0603 3965,2110.47 r180 top (schematic designator R14)
R14_TR4 "4.7K" R0603 3685.47,2105 r180 top (schematic designator R14)
R15 "0603" J1-0603 1200,2525 r180 top
R16 "0603" J1-0603 1200,2575 r180 top
R17 "200K" R0402 2963.31,3139.43 r180 top
R18 "0603" J1-0603 610,2575 r180 top
R19_TR1 "4.7K" R0603 3257.95,2160 r180 top (schematic designator R19)
R19_TR2 "4.7K" R0603 2982.95,2160 r180 top (schematic designator R19)
R19_TR3 "4.7K" R0603 3965.47,2160.47 r180 top (schematic designator R19)
R19_TR4 "4.7K" R0603 3685.47,2155.47 r180 top (schematic designator R19)
R20 "0603" J1-0603 610,2525 r180 top
R21 "10K" R0603 291,3179 r270 top
R22 "0603" J1-0603 1350,2416.54 r270 top
R23 "0603" J1-0603 1240,2416.54 r0 top
R24 "1M" R0402 405,2175 r90 top
R25 "1K" R0603 275,2830 r180 top
R26 "1K" R0603 275,2775 r180 top
R27 "1K" R0603 2470,2530 r90 top
R28 "1K" R0603 2410,2530 r90 top
R30_M1 "1M" R0402 238,704 r270 top (schematic designator R30)
R30_M2 "1M" R0402 933,704 r270 top (schematic designator R30)
R30_M3 "1M" R0402 2323,704 r270 top (schematic designator R30)
R30_M4 "1M" R0402 3018,704 r270 top (schematic designator R30)
R31_M1 "0603" J1-0603 739,719 r90 top (schematic designator R31)
R31_M2 "0603" J1-0603 1434,719 r90 top (schematic designator R31)
R31_M3 "0603" J1-0603 2824,719 r90 top (schematic designator R31)
R31_M4 "0603" J1-0603 3519,719 r90 top (schematic designator R31)
R32_M1 "2512" 2512R-0.55 725,939.74 r270 top (schematic designator R32)
R32_M2 "2512" 2512R-0.55 1420,939.74 r270 top (schematic designator R32)
R32_M3 "2512" 2512R-0.55 2810,939.74 r270 top (schematic designator R32)
R32_M4 "2512" 2512R-0.55 3505,939.74 r270 top (schematic designator R32)
R33_M1 "2512" 2512R-0.55 175,939.74 r270 top (schematic designator R33)
R33_M2 "2512" 2512R-0.55 870,939.74 r270 top (schematic designator R33)
R33_M3 "2512" 2512R-0.55 2260,940 r270 top (schematic designator R33)
R33_M4 "2512" 2512R-0.55 2955,939.74 r270 top (schematic designator R33)
R36 "1M" R0402 1631.26,704.74 r270 top
R37 "0603" J1-0603 2131.26,719.74 r90 top
R38 "2512" 2512R-0.55 2115.26,939.74 r270 top
R39 "2512" 2512R-0.55 1564.26,939.74 r270 top
R45 "10r" R0603 465,3474.57 r90 top
R46 "100K" R0603 515,3474.57 r90 top
R47 "1.8K" R0603 595,3625 r90 top
R52 "10r" R0603 665,3475 r90 top
R55 "100K" R0603 715,3475 r90 top
R56 "1.8K" R0603 825,3388.64 r90 top
R58 "10r" R0603 1106,3219 r90 top
R59 "100K" R0603 1083,3141 r180 top
R60 "1.8K" R0603 1225,3390 r90 top
R62 "10r" R0603 1506,3220 r90 top
R63 "100K" R0603 1483,3142 r180 top
R64 "1.8K" R0603 1625,3390 r90 top
R66 "10r" R0603 1906,3220 r90 top
R67 "100K" R0603 1884,3142 r180 top
R68 "1.8K" R0603 2080.5,3390.81 r90 top
R70 "10r" R0603 2345.5,3175.81 r90 top
R71 "100K" R0603 2320,3105 r180 top
S1 "1571610-2" B3F-31XX 145,3135 r270 top locked
T1 "Molex 0395311010" MSTBV10 1380,3840 r0 top
T2 "con-phoenix-508 - 2" "MSTBV2 - duplicate" 3890,940 r270 top
T3 "con-phoenix-508 - 4" MSTBV4 3890,3270 r270 top
T4 "Molex 0705430003" 4POL254 3720,2675 r0 top
TP2 "TP4" TP-2#1 3414.17,2100.47 r180 top
TP6 "TP4" TP-2#1 2315,2670 r90 top
TP7 "TP4" TP-2#1 2365,2730 r90 top
TP8 "TP4" TP-2#1 2275,2730 r90 top
TP9_ES1 "TP4" TP-2#2 3145,1815 r270 bottom (schematic designator TP9)
TP9_ES2 "TP4" TP-2#2 3975,1815 r270 bottom (schematic designator TP9)
TP9_ES3 "TP4" TP-2#2 3560,1815 r270 bottom (schematic designator TP9)
TP10_ES1 "TP4" TP-2#2 2945,1793.03 r270 bottom (schematic designator TP10)
TP10_ES2 "TP4" TP-2#2 3775,1793.03 r270 bottom (schematic designator TP10)
TP10_ES3 "TP4" TP-2#2 3360,1793.03 r270 bottom (schematic designator TP10)
TP11 "TP4" TP-2#2 1030,3670 r270 bottom
TP12 "TP4" TP-2#2 1431,3671 r90 bottom
TP13 "TP4" TP-2#2 1831,3671 r270 bottom
TP14 "TP4" TP-2#2 2360.5,3535.81 r270 bottom
TP15 "TP4" TP-2#1 2201.26,1228.74 r180 top
TP16 "TP4" TP-2#1 1871.26,1234.74 r180 top
TP17 "TP4" TP-2#1 1711.26,1239.74 r90 top
TP18 "TP4" TP-2#1 1751.26,1174.74 r90 top
TP19 "TP4" TP-2#1 1791.26,1234.74 r90 top
TP20 "TP4" TP-2#1 1911.26,1174.74 r90 top
TP21 "TP4" TP-2#1 1831.26,1174.74 r90 top
TP32_M1 "TP4" TP-2#1 481.23,1245.77 r180 top (schematic designator TP32)
TP32_M2 "TP4" TP-2#1 1176.23,1245.77 r180 top (schematic designator TP32)
TP32_M3 "TP4" TP-2#1 2566.23,1245.77 r180 top (schematic designator TP32)
TP32_M4 "TP4" TP-2#1 3261.23,1245.77 r180 top (schematic designator TP32)
TP33_M1 "TP4" TP-2#1 811.26,1228.74 r180 top (schematic designator TP33)
TP33_M2 "TP4" TP-2#1 1506.26,1228.74 r180 top (schematic designator TP33)
TP33_M3 "TP4" TP-2#1 2865,1230 r180 top (schematic designator TP33)
TP33_M4 "TP4" TP-2#1 3526.26,1228.74 r180 top (schematic designator TP33)
TP35_M1 "TP4" TP-2#1 321.23,1245.77 r180 top (schematic designator TP35)
TP35_M2 "TP4" TP-2#1 1016.23,1245.77 r180 top (schematic designator TP35)
TP35_M3 "TP4" TP-2#1 2406.23,1245.77 r180 top (schematic designator TP35)
TP35_M4 "TP4" TP-2#1 3101.23,1245.77 r180 top (schematic designator TP35)
TP36_M1 "TP4" TP-2#1 361.23,1185.77 r180 top (schematic designator TP36)
TP36_M2 "TP4" TP-2#1 1056.23,1185.77 r180 top (schematic designator TP36)
TP36_M3 "TP4" TP-2#1 2446.23,1185.77 r180 top (schematic designator TP36)
TP36_M4 "TP4" TP-2#1 3141.23,1185.77 r180 top (schematic designator TP36)
TP37_M1 "TP4" TP-2#1 401.23,1245.77 r180 top (schematic designator TP37)
TP37_M2 "TP4" TP-2#1 1096.23,1245.77 r180 top (schematic designator TP37)
TP37_M3 "TP4" TP-2#1 2486.23,1245.77 r180 top (schematic designator TP37)
TP37_M4 "TP4" TP-2#1 3181.23,1245.77 r180 top (schematic designator TP37)
TP38 "TP4" TP-2#2 2815,2510 r270 bottom
TP39_M1 "TP4" TP-2#1 521.23,1185.77 r180 top (schematic designator TP39)
TP39_M2 "TP4" TP-2#1 1216.23,1185.77 r180 top (schematic designator TP39)
TP39_M3 "TP4" TP-2#1 2606.23,1185.77 r180 top (schematic designator TP39)
TP39_M4 "TP4" TP-2#1 3301.23,1185.77 r180 top (schematic designator TP39)
TP40_M1 "TP4" TP-2#1 441.23,1185.77 r180 top (schematic designator TP40)
TP40_M2 "TP4" TP-2#1 1136.23,1185.77 r180 top (schematic designator TP40)
TP40_M3 "TP4" TP-2#1 2526.23,1185.77 r180 top (schematic designator TP40)
TP40_M4 "TP4" TP-2#1 3221.23,1185.77 r180 top (schematic designator TP40)
TP43 "TP4" TP-2#2 2620,2570 r270 bottom
TP44 "TP4" TP-2#2 2656.1,2511.1 r270 bottom
TP45 "TP4" TP-2#2 2695,2570 r270 bottom
TP46 "TP4" TP-2#2 2735,2510 r270 bottom
TP47 "TP4" TP-2#2 2775,2570 r270 bottom
TP52_TR1 "TP4" TP-2#1 2860,2060 r180 top (schematic designator TP52)
TP52_TR2 "TP4" TP-2#1 2800,2100 r180 top (schematic designator TP52)
TP52_TR3 "TP4" TP-2#2 2860,1980 r270 bottom (schematic designator TP52)
TP52_TR4 "TP4" TP-2#2 2800,2020 r0 bottom (schematic designator TP52)
U1 "LM25011MY/NOPB" VSSOP10 3132.31,3130.43 r0 top
U2 "MIC5209-3.3YS" SOT230P700X190-4N 3010,2710 r0 top
U3 "ATML-ATSAM3X-LQFP-144" LQFP144_N 1885,2131.1 r270 top locked
U5 "DRV8825" DRV8825 1840.26,939 r90 top
U6 "ADuM4160" ADuM4160 905,2650 r0 top
U7_M1 "DRV8825" DRV8825 450,939 r90 top (schematic designator U7)
U7_M2 "DRV8825" DRV8825 1145,939 r90 top (schematic designator U7)
U7_M3 "DRV8825" DRV8825 2535,939 r90 top (schematic designator U7)
U7_M4 "DRV8825" DRV8825 3230,939 r90 top (schematic designator U7)
U8 "TXB0106 Level Shifter" TSOP65P640X120-16N 2713,2817.44 r90 top
U9 "S25FL216K0PMFI041" S25FL216K0PMFI041 2110,1360 r0 top
X2 "445C35A12M00000" 445C35A12M00000 1300,2860 r0 top

## Footprints (in the part's own frame and the unit in brackets; to place one, negate y for a bottom-side part, rotate by r counter-clockwise, add the part's x,y. Pads: shape width x height; smd on the part's side, far side on the other; paste and mask are expansions set on the pad)
1N4148WT [mm] "Molded Diode, 2-Leads, Body 1.20x0.80mm, IPC Medium Density"
  rect 1x0.3 smd: 1(-0.675,0) 2(0.675,0)
  silkscreen extent -0.7,-0.5 1.15,0.55, body extent -0.65,-0.45 0.65,0.45, height 0.7
4POL254 [mil]
  oval 60x120 hole 40: 1(-150,0) 2(-50,0) 3(50,0) 4(150,0)
  silkscreen extent -250,-150 250,113, body extent -250,-150 250,113, height 454
302-S161 [mm] "2.54mm pitch 2X8 1 Pin Shrouded Connector"
  rect 1.5x1.5 hole 0.9: 1(0,-2.54)
  round 1.5 hole 0.9: 2(0,0) 3(2.54,-2.54) 4(2.54,0) 5(5.08,-2.54) 6(5.08,0) 7(7.62,-2.54) 8(7.62,0) 9(10.16,-2.54) 10(10.16,0) 11(12.7,-2.54) 12(12.7,0) 13(15.24,-2.54) 14(15.24,0) 15(17.78,-2.54) 16(17.78,0)
  silkscreen extent -5.08,-5.82 22.86,3.28, body extent -5.08,-5.84 22.86,3.3, height 9.1
445C35A12M00000 [mm] "Crystal Oscillator"
  rect 1.8x2.4 smd: 1(0,0) 2(3.8,0)
  silkscreen extent -1.65,-1.91 5.46,1.91, body extent -1.27,-1.52 5.08,1.52, height 1
1608[0603] [mm] "Chip Capacitor, Body 1.6x0.8mm, IPC High Density"
  rect 0.8x0.9 smd: 1(-0.7,0) 2(0.7,0)
  body extent -0.87,-0.48 0.87,0.48, height 1.3
2512R-0.55 [mm] "2512 Resistor 6.35mm x 3.2mm x 0.55mm"
  rect 0.9x3.3 smd: 1(-2.95,0) 2(2.95,0)
  silkscreen extent -2.1,-1.55 2.1,1.55, body extent -3.22,-1.68 3.22,1.68, height 0.65
"3522-2 - WAVE SOLDER" [mil]
  oct 140x200 hole 100: 1(-280,0) 1(-80,0) 2(80,0) 2(280,0)
  silkscreen extent -400,-100 400,100, body extent -402,-103 402,103, height 709
70543-02 [mil]
  oval 60x120 hole 40: 1(-50,0) 2(50,0)
  silkscreen extent -150,-150 150,113, body extent -150,-150 150,113, height 450
70543-03 [mil]
  oval 60x120 hole 40: 1(-100,0) 2(0,0) 3(100,0)
  silkscreen extent -200,-150 200,113, body extent -200,-150 200,113, height 450
ADuM4160 [mm] "SOIC, 16-Leads, Body 10.30x7.50mm, Pitch 1.27mm, IPC Medium Density"
  oval 2.3x0.6 smd: 1(-4.575,4.445) 2(-4.575,3.175) 3(-4.575,1.905) 4(-4.575,0.635) 5(-4.575,-0.635) 6(-4.575,-1.905) 7(-4.575,-3.175) 8(-4.575,-4.445) 9(4.575,-4.445) 10(4.575,-3.175) 11(4.575,-1.905) 12(4.575,-0.635) 13(4.575,0.635) 14(4.575,1.905) 15(4.575,3.175) 16(4.575,4.445)
  silkscreen extent -4.7,-5.25 3.03,5.42, body extent -3.8,-5.25 3.8,5.25, height 2.65
B3F-31XX [mil]
  oct 70x70 hole 40: 1(-89,-49) 2(89,-49)
  round 100 hole 59: 3(-138,49) 4(138,49)
  silkscreen extent -145,-165 145,10, body extent -165,-200 165,109, height 303
BLM18PG121SN1D [mm] "Chip Inductor, 2-Leads, Body 1.0x0.5mm, IPC Medium Density"
  rect 0.8x0.6 smd: 1(-0.6,0) 2(0.6,0)
  body extent -0.52,-0.28 0.53,0.27, height 0.6
C12,5-5 [mil]
  round 100 hole 40: 1(-98.43,0) 2(98.43,0)
  silkscreen extent -252,-252 252,252, body extent -252,-252 252,252, height 787
C0402 [mil]
  rrect40% 22x24 smd: 1(-18.7,0) 2(19,0)
  body extent -20,-10 20,10, height 20
C0603 [mm]
  rrect40% 0.74x1 smd: 1(-0.68,0) 2(0.68,0)
  body extent -0.8,-0.4 0.8,0.4, height 0.8
C0805 [mil]
  rrect50% 52x60 smd: 1(-37.4,0) 2(38,0)
  body extent -40,-30 40,30, height 35
C1206#1 [mm] "Chip Capacitor, Body 3.2x1.6mm, IPC High Density"
  rect 1.1x1.7 smd: 1(-1.35,0) 2(1.35,0)
  silkscreen extent -0.4,-0.75 0.4,0.75, body extent -1.7,-0.9 1.7,0.9, height 1.3
C1206#2 [mm]
  rect 1.1x1.7 smd: 1(-1.325,0) 2(1.325,0)
  silkscreen extent -0.4,-0.75 0.4,0.75, body extent -1.68,-0.87 1.67,0.88, height 1.6
DRV8825 [mm]
  oval 1.7x0.35 smd: 1(-2.85,4.225) 2(-2.85,3.575) 3(-2.85,2.925) 4(-2.85,2.275) 5(-2.85,1.625) 6(-2.85,0.975) 7(-2.85,0.325) 8(-2.85,-0.325) 9(-2.85,-0.975) 10(-2.85,-1.625) 11(-2.85,-2.275) 12(-2.85,-2.925) 13(-2.85,-3.575) 14(-2.85,-4.225) 15(2.85,-4.225) 16(2.85,-3.575) 17(2.85,-2.925) 18(2.85,-2.275) 19(2.85,-1.625) 20(2.85,-0.975) 21(2.85,-0.325) 22(2.85,0.325) 23(2.85,0.975) 24(2.85,1.625) 25(2.85,2.275) 26(2.85,2.925) 27(2.85,3.575) 28(2.85,4.225)
  rect 3.1x5.22 smd: 29(0,0)
  silkscreen extent -2.97,-4.9 1.6,5.07, body extent -2.25,-4.9 2.25,4.9, height 1.2
EEE-1VA101XP [mm] "Panasonic VS D EEE-1VA101XP"
  rect 3.4x1.4 smd: 1(2.6,0) 2(-2.6,0)
  silkscreen extent -3,-3.2 3,3.2, body extent -3.5,-3.3 3.5,3.3, height 5.4
FIDUCIAL-1X2 [mil]
  rrect100% 40x40 smd paste-3897.64 mask+20: 1(0,0)
  body extent -40,-40 40,40, height 1
FTSH-105-XX-X-DV [mm] "1.27mm pitch, 10 pin, terminal strip; vertical, SMT"
  rect 0.75x2.8 smd mask+0: 1(2.54,2.03) 2(2.54,-2.03) 3(1.27,2.03) 4(1.27,-2.03) 5(0,2.03) 6(0,-2.03) 7(-1.27,2.03) 8(-1.27,-2.03) 9(-2.54,2.03) 10(-2.54,-2.03)
  silkscreen extent 3.28,3.03 3.52,3.27
HDR1X2 [mm] "Connector; Header; 2 Position"
  rect 1.5x1.5 hole 0.9: 1(0,0)
  round 1.5 hole 0.9: 2(2.54,0)
  silkscreen extent -1.27,-1.27 3.81,1.27
HDR2X4 [mm] "Connector; Header; 4x2 Position"
  rect 1.5x1.5 hole 0.9: 1(0,0)
  round 1.5 hole 0.9: 2(0,2.54) 3(2.54,0) 4(2.54,2.54) 5(5.08,0) 6(5.08,2.54) 7(7.62,0) 8(7.62,2.54)
  silkscreen extent -1.27,-1.27 8.89,3.81
HDR2X5 [mm] "Connector; Header; 5x2 Position"
  rect 1.5x1.5 hole 0.9: 1(0,0)
  round 1.5 hole 0.9: 2(0,2.54) 3(2.54,0) 4(2.54,2.54) 5(5.08,0) 6(5.08,2.54) 7(7.62,0) 8(7.62,2.54) 9(10.16,0) 10(10.16,2.54)
  silkscreen extent -1.27,-1.27 11.43,3.81
IRLML6346 [mm] "SOT23, 3-Leads, Body 2.92x2.37mm, Pitch 0.95mm, IPC Medium Density"
  rect 1.6x0.6 smd: 1(-0.9,0.95) 2(-0.9,-0.95) 3(0.9,0)
  silkscreen extent -1.02,-1.5 0.7,1.92, body extent -0.7,-1.52 0.7,1.52, height 1.12
J1-0603 [mm] "Chip Resistor, Body 1.6x0.8mm, IPC High Density"
  rect 0.7x0.9 smd: 1(-0.75,0) 2(0.75,0)
  silkscreen extent -0.2,-0.35 0.2,0.35, body extent -0.85,-0.48 0.85,0.48, height 0.9
LED2012120 [mil]
  rect 48x48 smd: A(-41.34,0) C(42,0)
  silkscreen extent 0,-27 12,27, body extent -50,-25 50,25, height 28
LQFP144_N [mm] "Thin QFP, 144-Leads, Body 20x20mm, Pitch 0.5mm, IPC Medium Density"
  oval 1.8x0.3 smd: 1(-10.55,8.75) 2(-10.55,8.25) 3(-10.55,7.75) 4(-10.55,7.25) 5(-10.55,6.75) 6(-10.55,6.25) 7(-10.55,5.75) 8(-10.55,5.25) 9(-10.55,4.75) 10(-10.55,4.25) 11(-10.55,3.75) 12(-10.55,3.25) 13(-10.55,2.75) 14(-10.55,2.25) 15(-10.55,1.75) 16(-10.55,1.25) 17(-10.55,0.75) 18(-10.55,0.25) 19(-10.55,-0.25) 20(-10.55,-0.75) 21(-10.55,-1.25) 22(-10.55,-1.75) 23(-10.55,-2.25) 24(-10.55,-2.75) 25(-10.55,-3.25) 26(-10.55,-3.75) 27(-10.55,-4.25) 28(-10.55,-4.75) 29(-10.55,-5.25) 30(-10.55,-5.75) 31(-10.55,-6.25) 32(-10.55,-6.75) 33(-10.55,-7.25) 34(-10.55,-7.75) 35(-10.55,-8.25) 36(-10.55,-8.75) 73(10.55,-8.75) 74(10.55,-8.25) 75(10.55,-7.75) 76(10.55,-7.25) 77(10.55,-6.75) 78(10.55,-6.25) 79(10.55,-5.75) 80(10.55,-5.25) 81(10.55,-4.75) 82(10.55,-4.25) 83(10.55,-3.75) 84(10.55,-3.25) 85(10.55,-2.75) 86(10.55,-2.25) 87(10.55,-1.75) 88(10.55,-1.25) 89(10.55,-0.75) 90(10.55,-0.25) 91(10.55,0.25) 92(10.55,0.75) 93(10.55,1.25) 94(10.55,1.75) 95(10.55,2.25) 96(10.55,2.75) 97(10.55,3.25) 98(10.55,3.75) 99(10.55,4.25) 100(10.55,4.75) 101(10.55,5.25) 102(10.55,5.75) 103(10.55,6.25) 104(10.55,6.75) 105(10.55,7.25) 106(10.55,7.75) 107(10.55,8.25) 108(10.55,8.75)
  oval 0.3x1.8 smd: 37(-8.75,-10.55) 38(-8.25,-10.55) 39(-7.75,-10.55) 40(-7.25,-10.55) 41(-6.75,-10.55) 42(-6.25,-10.55) 43(-5.75,-10.55) 44(-5.25,-10.55) 45(-4.75,-10.55) 46(-4.25,-10.55) 47(-3.75,-10.55) 48(-3.25,-10.55) 49(-2.75,-10.55) 50(-2.25,-10.55) 51(-1.75,-10.55) 52(-1.25,-10.55) 53(-0.75,-10.55) 54(-0.25,-10.55) 55(0.25,-10.55) 56(0.75,-10.55) 57(1.25,-10.55) 58(1.75,-10.55) 59(2.25,-10.55) 60(2.75,-10.55) 61(3.25,-10.55) 62(3.75,-10.55) 63(4.25,-10.55) 64(4.75,-10.55) 65(5.25,-10.55) 66(5.75,-10.55) 67(6.25,-10.55) 68(6.75,-10.55) 69(7.25,-10.55) 70(7.75,-10.55) 71(8.25,-10.55) 72(8.75,-10.55) 109(8.75,10.55) 110(8.25,10.55) 111(7.75,10.55) 112(7.25,10.55) 113(6.75,10.55) 114(6.25,10.55) 115(5.75,10.55) 116(5.25,10.55) 117(4.75,10.55) 118(4.25,10.55) 119(3.75,10.55) 120(3.25,10.55) 121(2.75,10.55) 122(2.25,10.55) 123(1.75,10.55) 124(1.25,10.55) 125(0.75,10.55) 126(0.25,10.55) 127(-0.25,10.55) 128(-0.75,10.55) 129(-1.25,10.55) 130(-1.75,10.55) 131(-2.25,10.55) 132(-2.75,10.55) 133(-3.25,10.55) 134(-3.75,10.55) 135(-4.25,10.55) 136(-4.75,10.55) 137(-5.25,10.55) 138(-5.75,10.55) 139(-6.25,10.55) 140(-6.75,10.55) 141(-7.25,10.55) 142(-7.75,10.55) 143(-8.25,10.55) 144(-8.75,10.55)
  silkscreen extent -10.67,-9.25 9.25,9.58, body extent -10,-10 10,10, height 1.6
"MSTBV2 - duplicate" [mil]
  oval 82.5x165 hole 55: 1(-300,0) 2(-100,0)
  silkscreen extent -425,-150 25,180, body extent -425,-150 25,180, height 472
MSTBV4 [mil]
  oval 82.5x165 hole 55: 1(-300,0) 2(-100,0) 3(100,0) 4(300,0)
  silkscreen extent -425,-150 425,180, body extent -428,-153 428,183, height 472
MSTBV10 [mil]
  oval 82.5x165 hole 55: 1(-900,0) 2(-700,0) 3(-500,0) 4(-300,0) 5(-100,0) 6(100,0) 7(300,0) 8(500,0) 9(700,0) 10(900,0)
  silkscreen extent -1025,-150 1025,180, body extent -1028,-153 1025,183, height 472
OSHW_8X150_NOTEXT [mil]
  silkscreen extent 0,0 167,150, body extent 0,2 168,148
PN61729 [mil]
  round 54 hole 38: 1(50,186) 2(-49.21,186) 3(-49.21,107) 4(50,107)
  round 130.5 hole 87: 5(-236.22,0) 6(237,0)
  body extent -237,-405 238,226, height 406
PSMN7R0-60YS [mm] "TO, 5-Pads, Body 5.15x5.86mm (max), IPC Medium Density"
  rect 1.8x0.6 smd: 1(-2.6,1.905) 2(-2.6,0.635) 3(-2.6,-0.635) 4(-2.6,-1.905)
  rect 4.8x4.5 smd: 5(1.14,0)
  silkscreen extent -2.72,2.63 -2.48,2.88, body extent -1.85,-2.5 2.25,2.5, height 1.2
R0402 [mil]
  rrect40% 22x24 smd: 1(-18.9,0) 2(19,0)
  body extent -20,-10 20,10, height 14
R0603 [mm]
  rrect40% 0.74x1 smd: 1(-0.68,0) 2(0.68,0)
  body extent -0.8,-0.4 0.8,0.4, height 0.8
S25FL216K0PMFI041 [mm] "SOIC, 8-Leads, Body 4.90x3.90mm, Pitch 1.27mm, IPC Medium Density"
  oval 1.5x0.6 smd: 1(-2.7,1.905) 2(-2.7,0.635) 3(-2.7,-0.635) 4(-2.7,-1.905) 5(2.7,-1.905) 6(2.7,-0.635) 7(2.7,0.635) 8(2.7,1.905)
  silkscreen extent -2.82,-2.45 1.55,2.88, body extent -1.95,-2.45 1.95,2.45, height 1.75
SJ [mil]
  rrect50% 46x63 smd: 1(-30,0) 2(30,0)
  silkscreen extent -65,-40 65,40, body extent -53,-31 53,31, height 4
SK310A-TP [mm] "Molded Diode, 2-Leads, Body 4.31x2.69mm, IPC Medium Density"
  rect 2.3x2.15 smd: 1(-1.625,0) 2(1.625,0)
  silkscreen extent -2.3,-1.45 3.07,1.75, body extent -2.29,-1.42 2.28,1.42, height 2.95
SMA-SM [mil]
  rect 79x79 smd: A(79,0) C(-78.74,0)
  silkscreen extent -89,-49 89,50, body extent -105,-54 105,55, height 116
SOD323-R [mil]
  rect 24x24 smd: A(44,0) C(-43.31,0)
  body extent -50,-31 50,31, height 28
SOT95P230X110-3N [mm] "SOT23, 3-Leads, Body 2.90x2.30mm, Pitch 0.95mm, IPC Medium Density"
  rect 1.4x0.6 smd: 1(-0.95,0.95) 2(-0.95,-0.95) 3(0.95,0)
  silkscreen extent -1.07,-1.5 0.7,1.93, body extent -0.7,-1.5 0.7,1.5, height 1.1
SOT230P700X190-4N [mm] "SOT223, 4-Leads, Body 6.50x7.00mm (avg), Pitch 2.30mm, IPC Medium Density"
  rect 2.4x1 smd: 1(-2.9,2.3) 2(-2.9,0) 3(-2.9,-2.3)
  rect 2.4x3.25 smd: 4(2.9,0)
  silkscreen extent -3.02,-3.35 1.4,3.47, body extent -1.85,-3.35 1.85,3.35, height 1.9
SZMM3Z4V7T1G [mm] "Molded Diode, 2-Leads, Body 1.70x1.25mm, IPC Medium Density"
  rect 0.9x0.35 smd: 1(-1,0) 2(1,0)
  silkscreen extent -0.95,-0.7 1.4,0.7, body extent -0.9,-0.67 0.9,0.67, height 1
TP-2#1 [mil]
  round 50 smd far side: 1(0,0)
TP-2#2 [mil]
  round 50 smd: 1(0,0)
TSOP65P640X120-16N [mm] "TSOP, 16-Leads, Body 5.00x4.40mm, Pitch 0.65mm, IPC Medium Density"
  oval 1.65x0.35 smd: 1(-2.825,2.275) 2(-2.825,1.625) 3(-2.825,0.975) 4(-2.825,0.325) 5(-2.825,-0.325) 6(-2.825,-0.975) 7(-2.825,-1.625) 8(-2.825,-2.275) 9(2.825,-2.275) 10(2.825,-1.625) 11(2.825,-0.975) 12(2.825,-0.325) 13(2.825,0.325) 14(2.825,0.975) 15(2.825,1.625) 16(2.825,2.275)
  silkscreen extent -2.95,-2.55 1.6,3.12, body extent -2.25,-2.55 2.25,2.55, height 1.2
VSSOP10 [mm] "TSSOP, 10-Leads, Body 3.15x3.00mm, Pitch 0.50mm, Thermal Pad 2.05.2x1.50.2mm, IPC High Density"
  rect 1.02x0.3 smd mask+0.102: 1(-2.4,1) 2(-2.4,0.5) 3(-2.4,0) 4(-2.4,-0.5) 5(-2.4,-1) 6(2.4,-1) 7(2.4,-0.5) 8(2.4,0) 9(2.4,0.5) 10(2.4,1)
  rect 1.73x1.9 smd: 11(0,0)
  silkscreen extent -2.02,-1.7 0.65,1.82, body extent -1.55,-1.7 1.55,1.7, height 1.09
Wave_hole_3x7-singleSided#1 [mil]
  round 0 hole 118.11 unplated paste+0 mask-112: 0(0,1.85)
  round 0 hole 15 paste-20 mask-20: 1(-100,0) 1(-70,-70) 1(-70,70) 1(0,-100) 1(0,100) 1(70,-70) 1(70,70) 1(100,0)
  round 60 smd paste-5 mask+0: 1(-94.49,-39.37) 1(-94.49,39.37) 1(-39.37,-94.49) 1(-39.37,94.49) 1(39.37,-94.49) 1(39.37,94.49) 1(94.49,-39.37) 1(94.49,39.37)
  Top Layer circle w64.96: c0,0 r105
  Bottom Layer lines w64.96: -78.26,-70 cw(c0,0) 74.25,74.25 cw(c0,0) 105,0 cw(c0,0) -78.26,-70
  body extent -105,-105 105,105
Wave_hole_3x7-singleSided#2 [mil]
  round 0 hole 118.11 unplated paste+0 mask-112: 0(0,0)
  round 0 hole 15 paste-20 mask-20: 1(-100,0) 1(-70,-70) 1(-70,70) 1(0,-100) 1(0,100) 1(70,-70) 1(70,70) 1(100,0)
  round 60 smd paste-5 mask+0: 1(-94.49,-39.37) 1(-94.49,39.37) 1(-39.37,-94.49) 1(-39.37,94.49) 1(39.37,-94.49) 1(39.37,94.49) 1(94.49,-39.37) 1(94.49,39.37)
  Top Layer circle w64.96: c0,0 r105
  Bottom Layer lines w64.96: -74.25,74.25 cw(c0,0) 105,0 cw(c0,0) 74.25,-74.25 cw(c0,0) -74.25,74.25
  body extent -105,-105 105,105
XAL50xx-153 [mm] "Precision Wire Wound Inductor, 2-Leads, Body 5.28x5.48mm, IPC High Density"
  rect 2.05x4.2 smd: 1(-2,0) 2(2,0)
  silkscreen extent -2.75,-2.85 2.75,2.85, body extent -2.74,-2.84 2.74,2.84, height 4.25